# Altium PCB S7CAS-PLEIADES-CARTE-MERE_P02.PcbDoc (part 1 of 2)
Units mil, origin at the board's own origin, x right, y up, seen from the top; angles counter-clockwise.
Board outline 5000 x 5000 mil, 14 copper layers (Signal 1 (Top), GND 1, Signal 2, GND 2, 24V, GND 3, 3V3, GND 4, GND 5, POWER, GND 6, Signal 3, GND 7, Signal 4 (Bottom)), stack 60.6 mil thick; 20 components, 396 nets, 808 pads, 46 vias.
Unrouted connection lines stored in the file: 242.
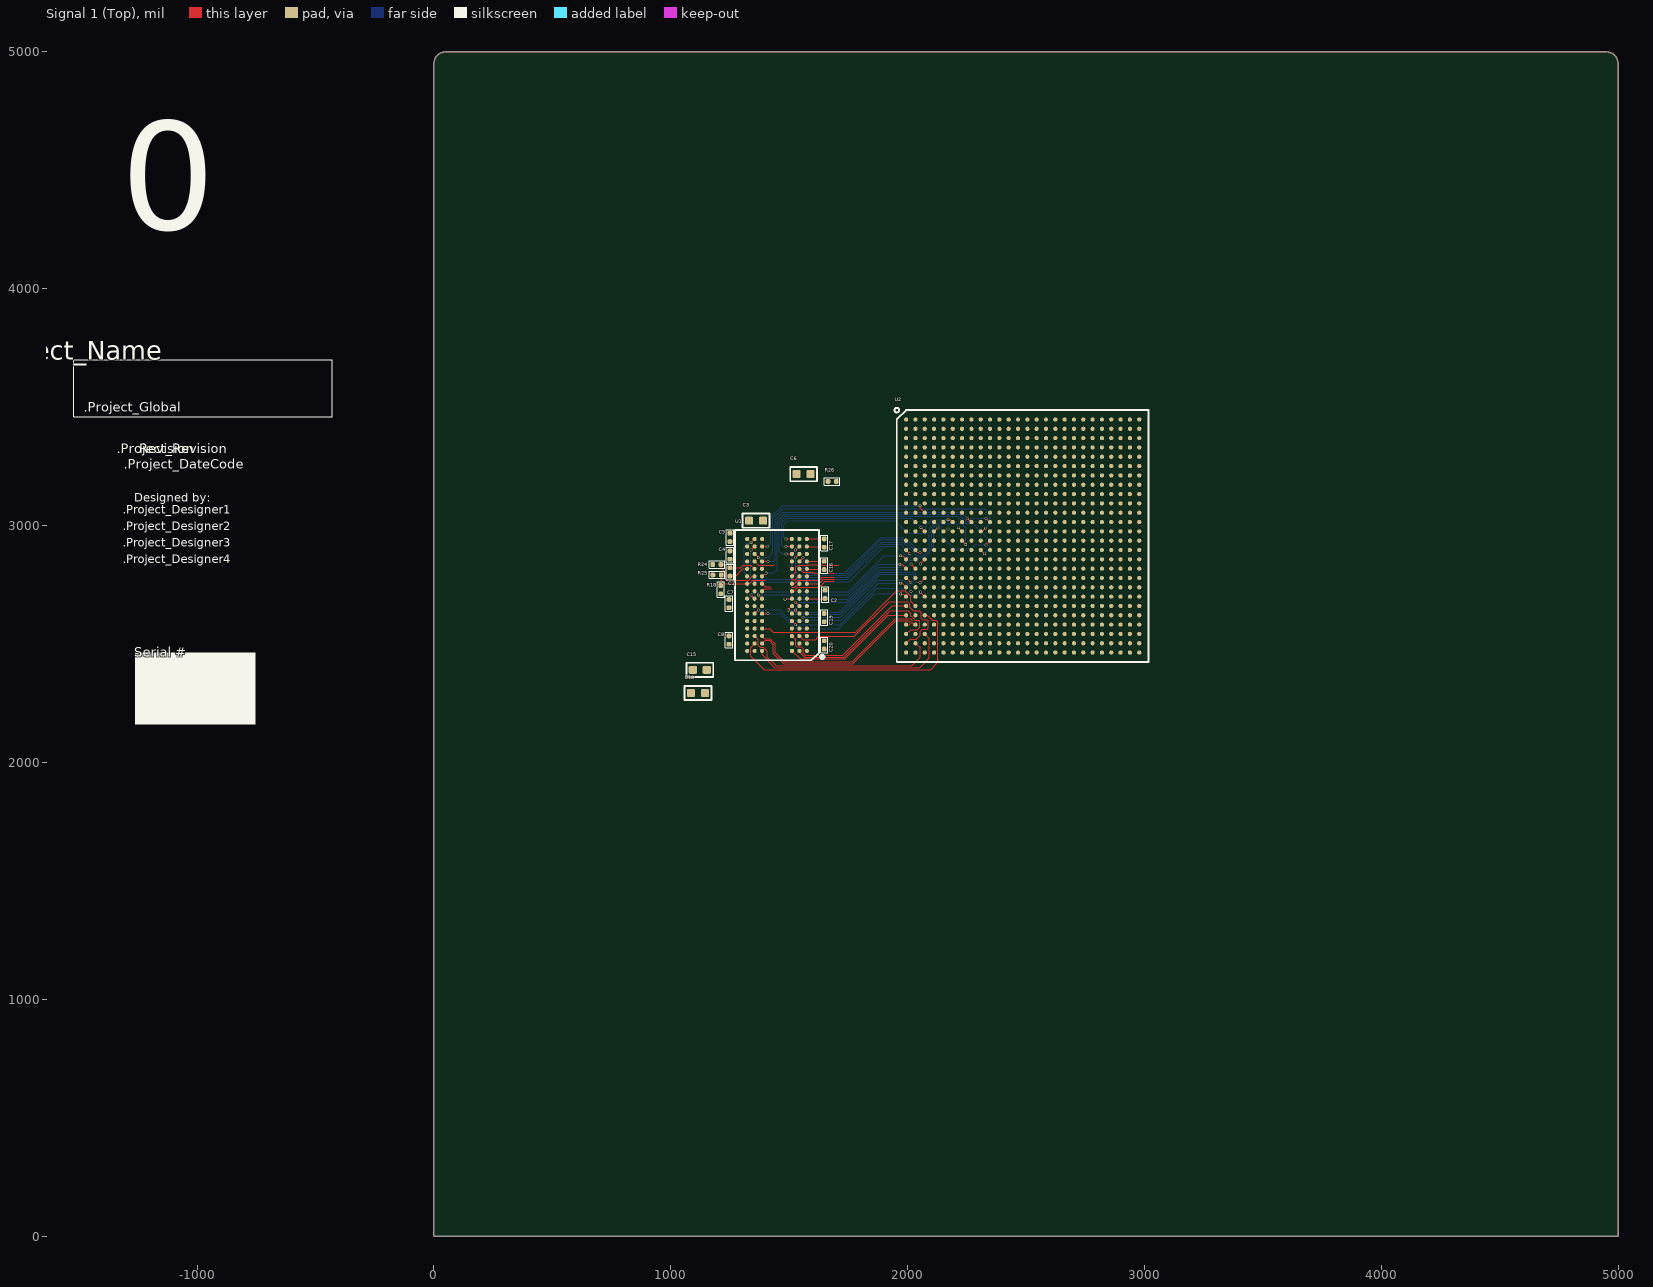
[diagram p0: Signal 1 (Top) view]
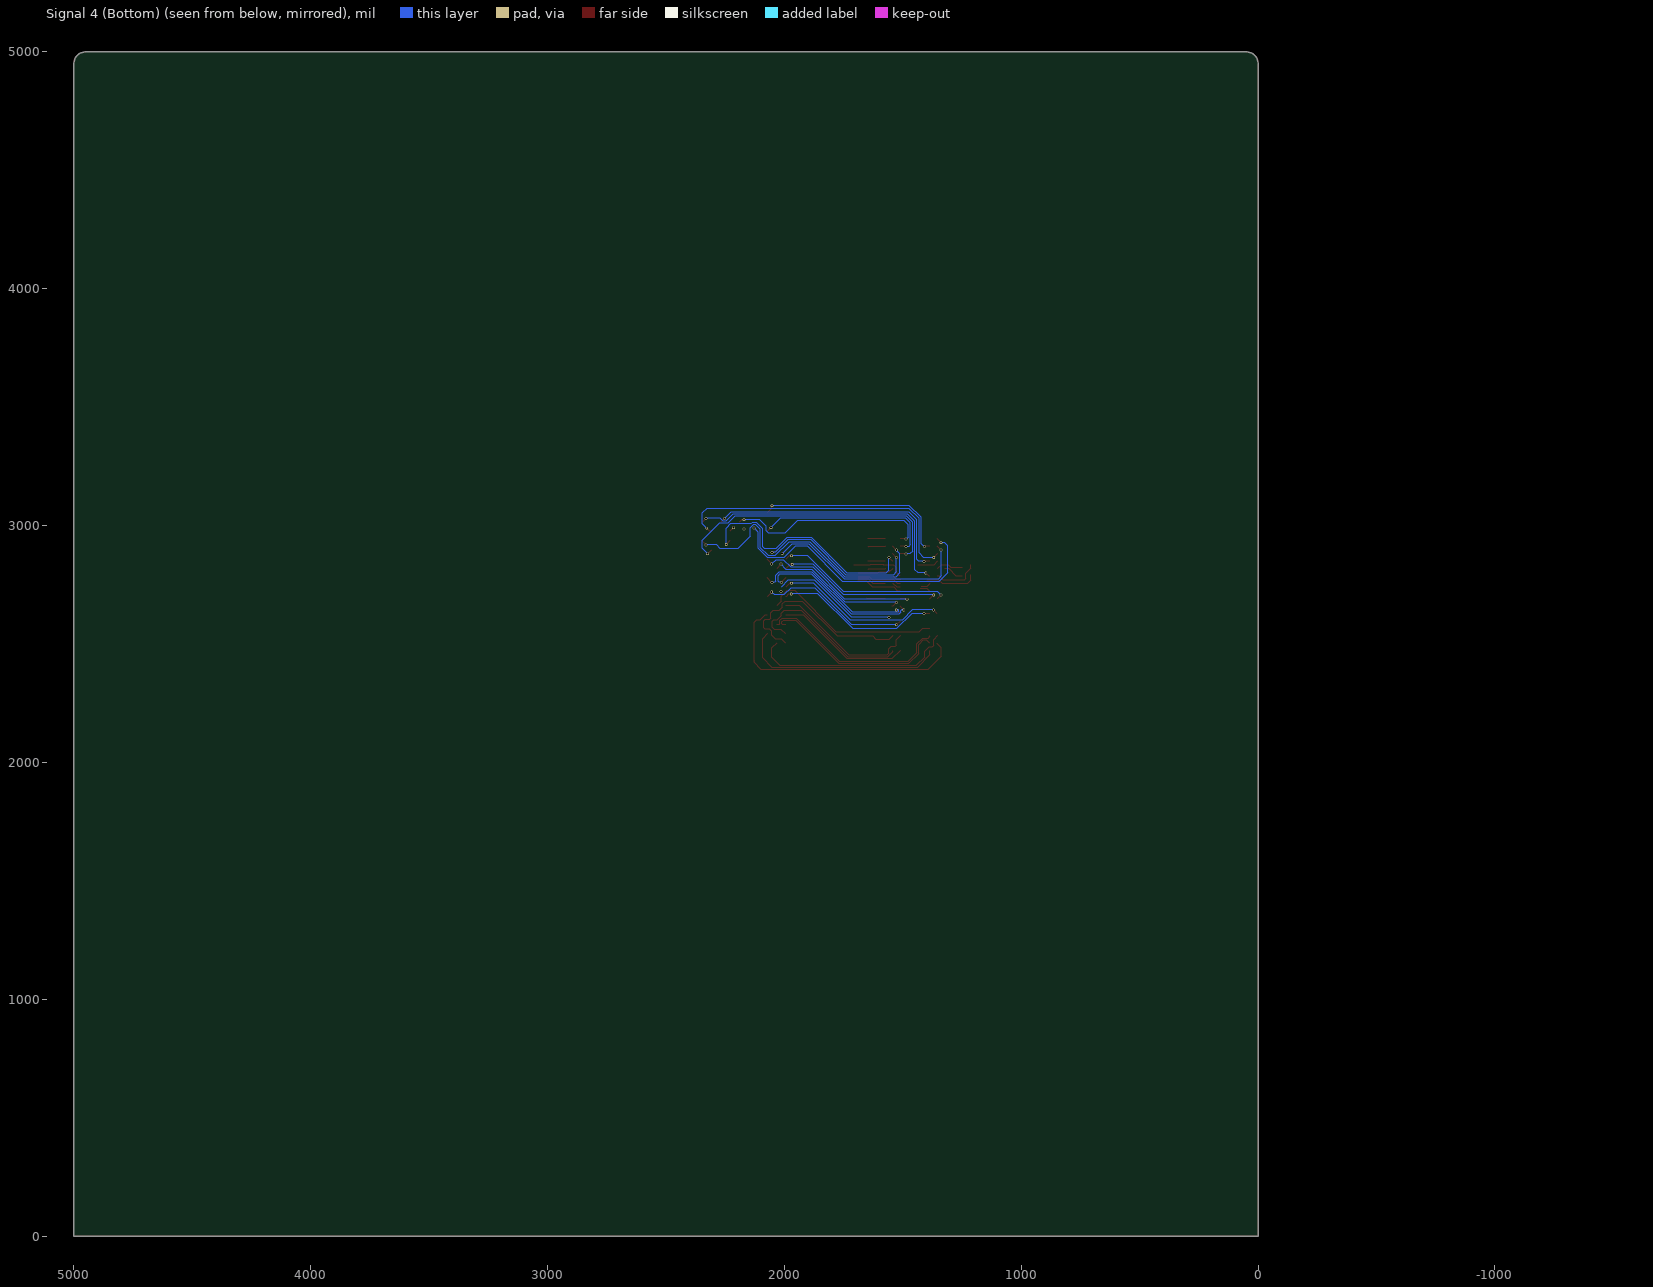
[diagram p1: Signal 4 (Bottom) view, seen from below]
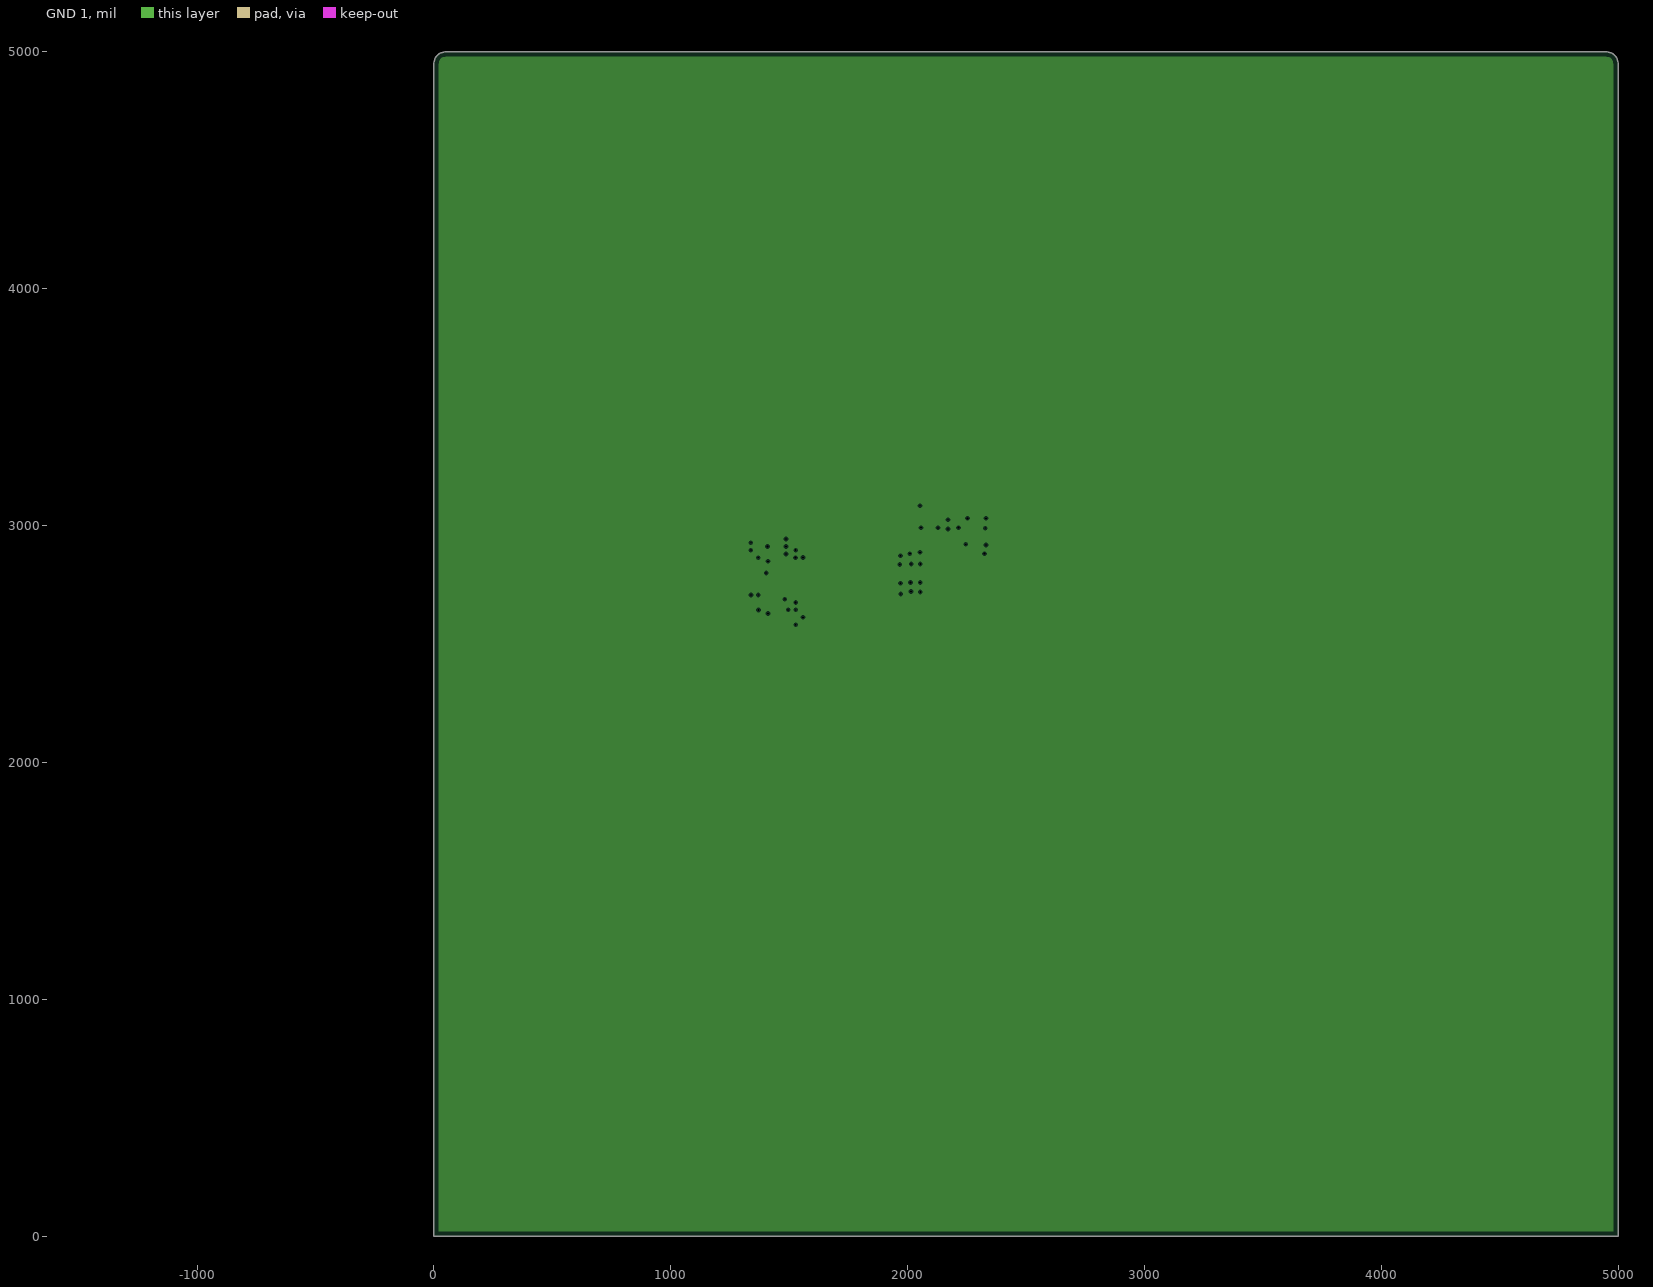
[diagram p2: GND 1, clearances drawn from the general rule]
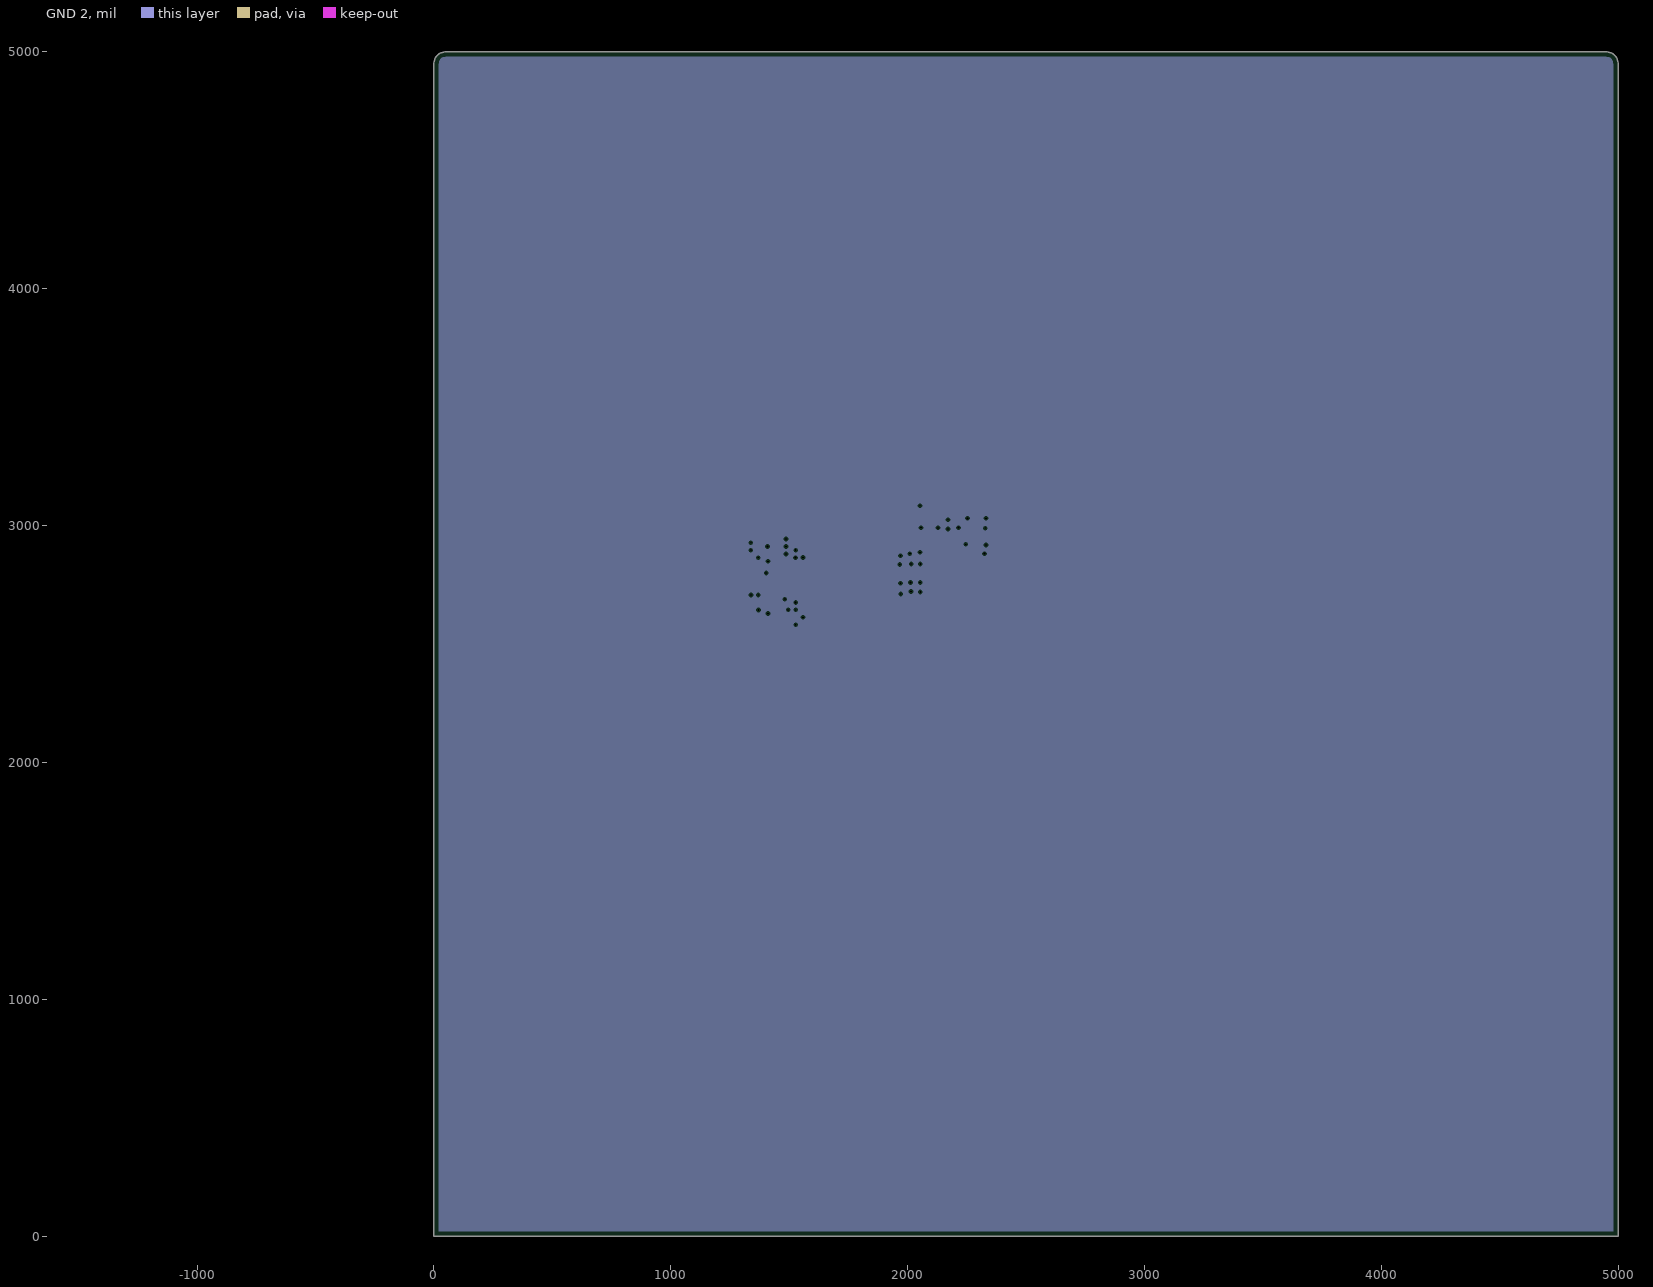
[diagram p3: GND 2, clearances drawn from the general rule]
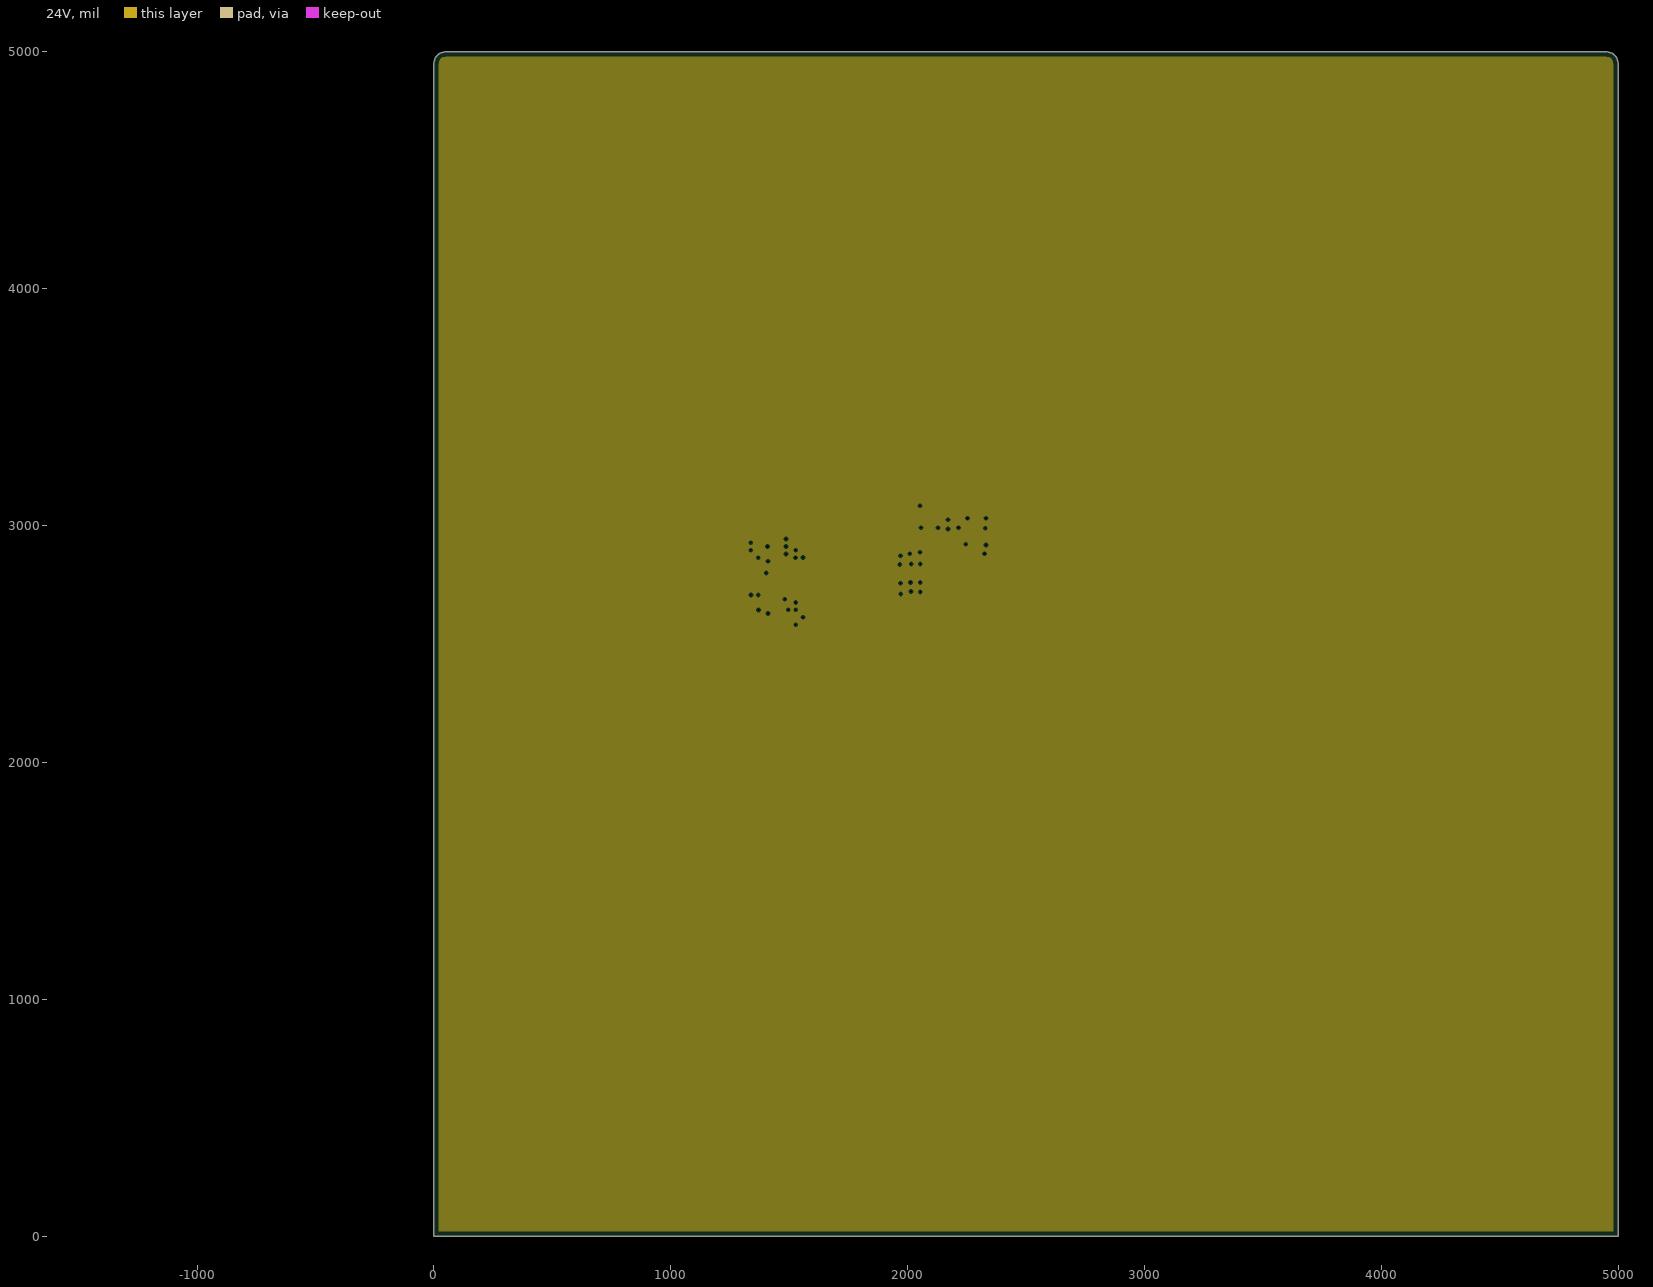
[diagram p4: 24V, clearances drawn from the general rule]
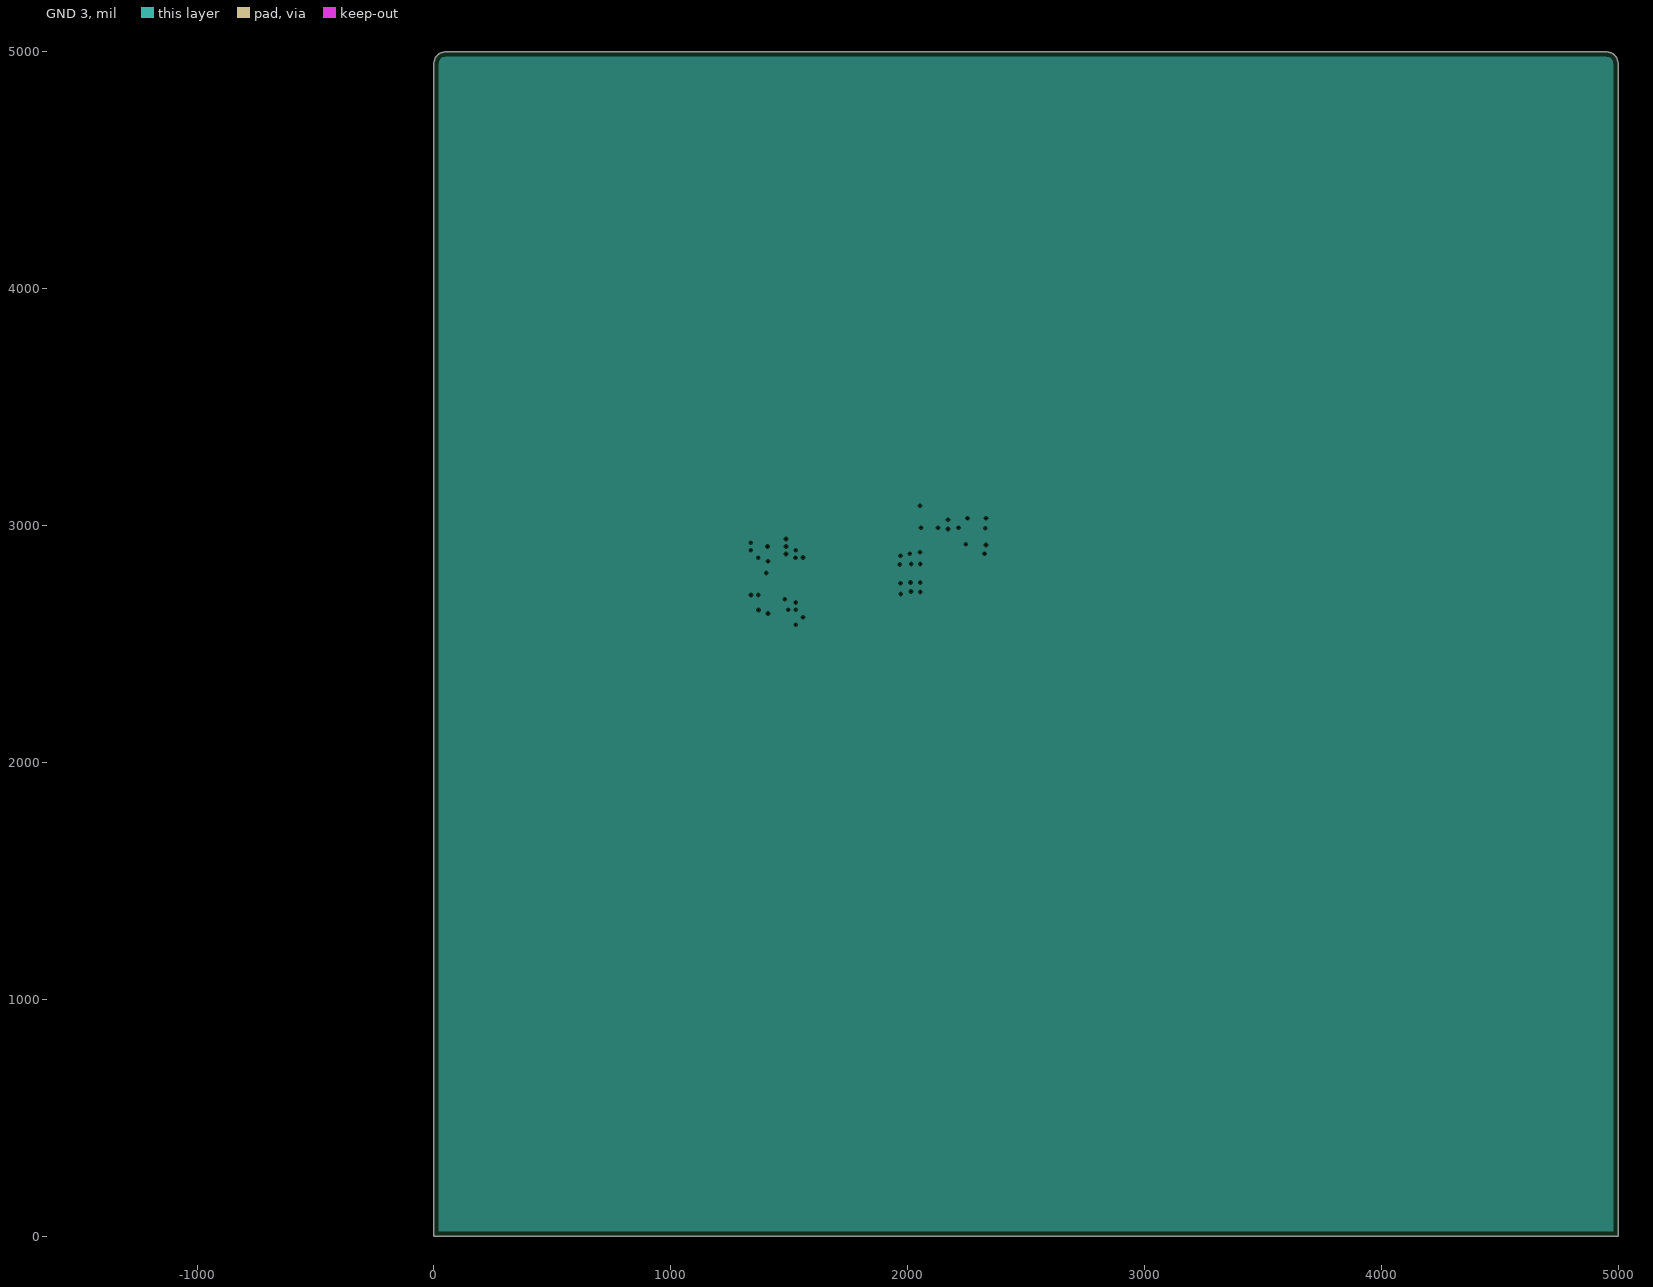
[diagram p5: GND 3, clearances drawn from the general rule]
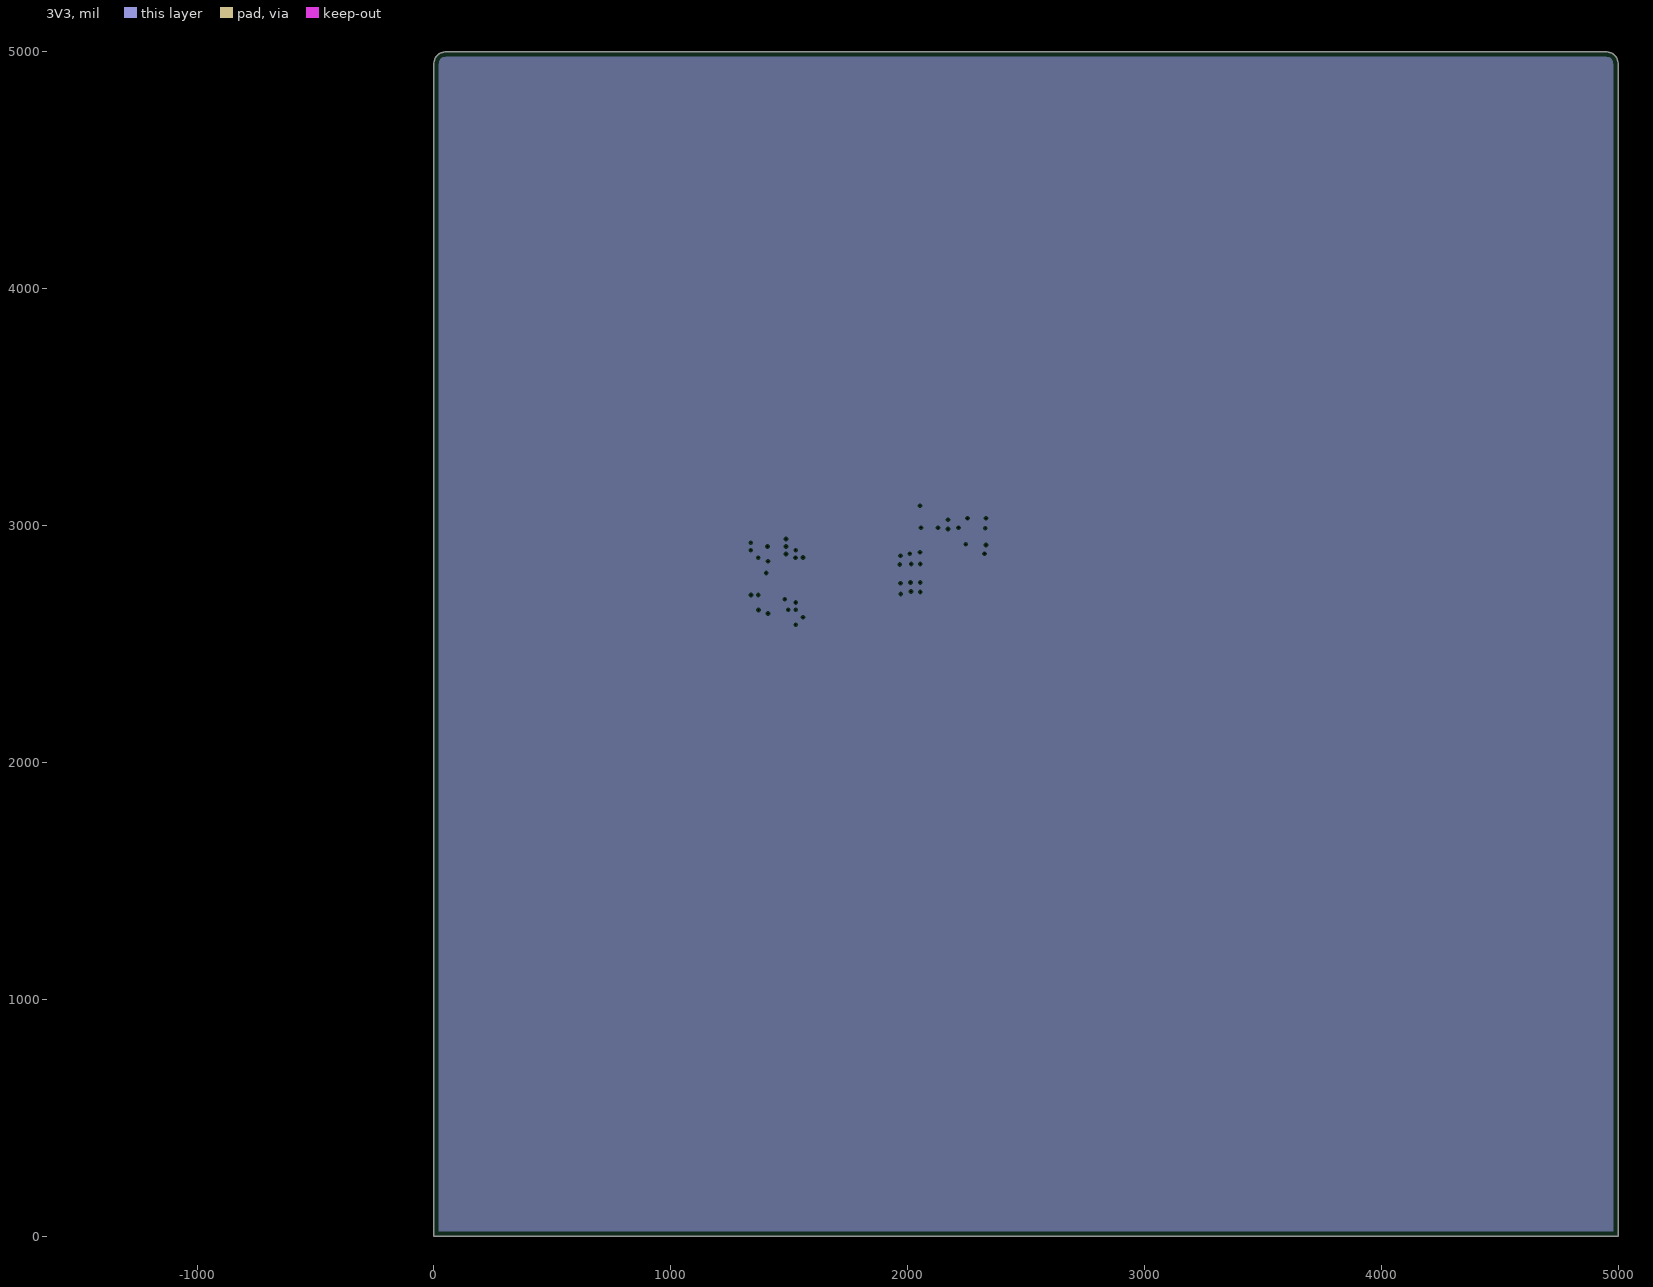
[diagram p6: 3V3, clearances drawn from the general rule]
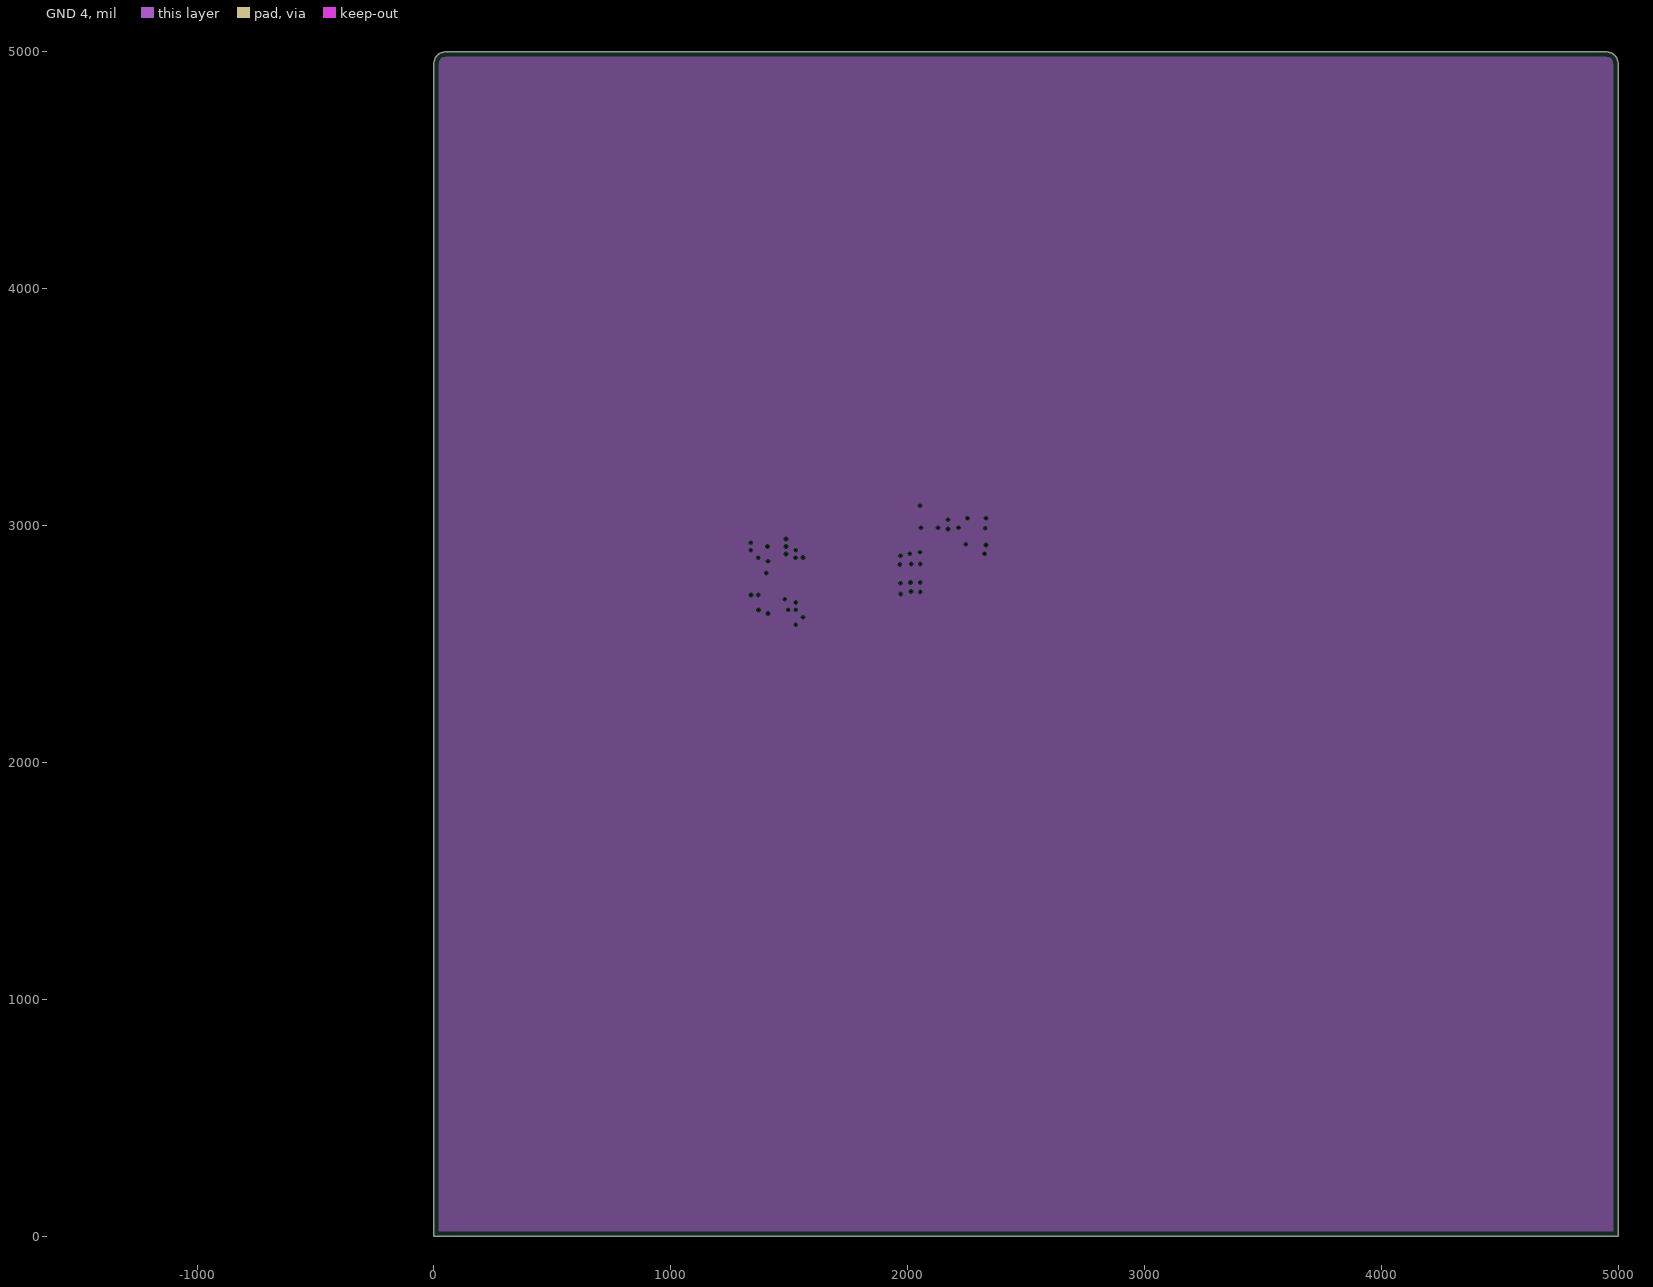
[diagram p7: GND 4, clearances drawn from the general rule]
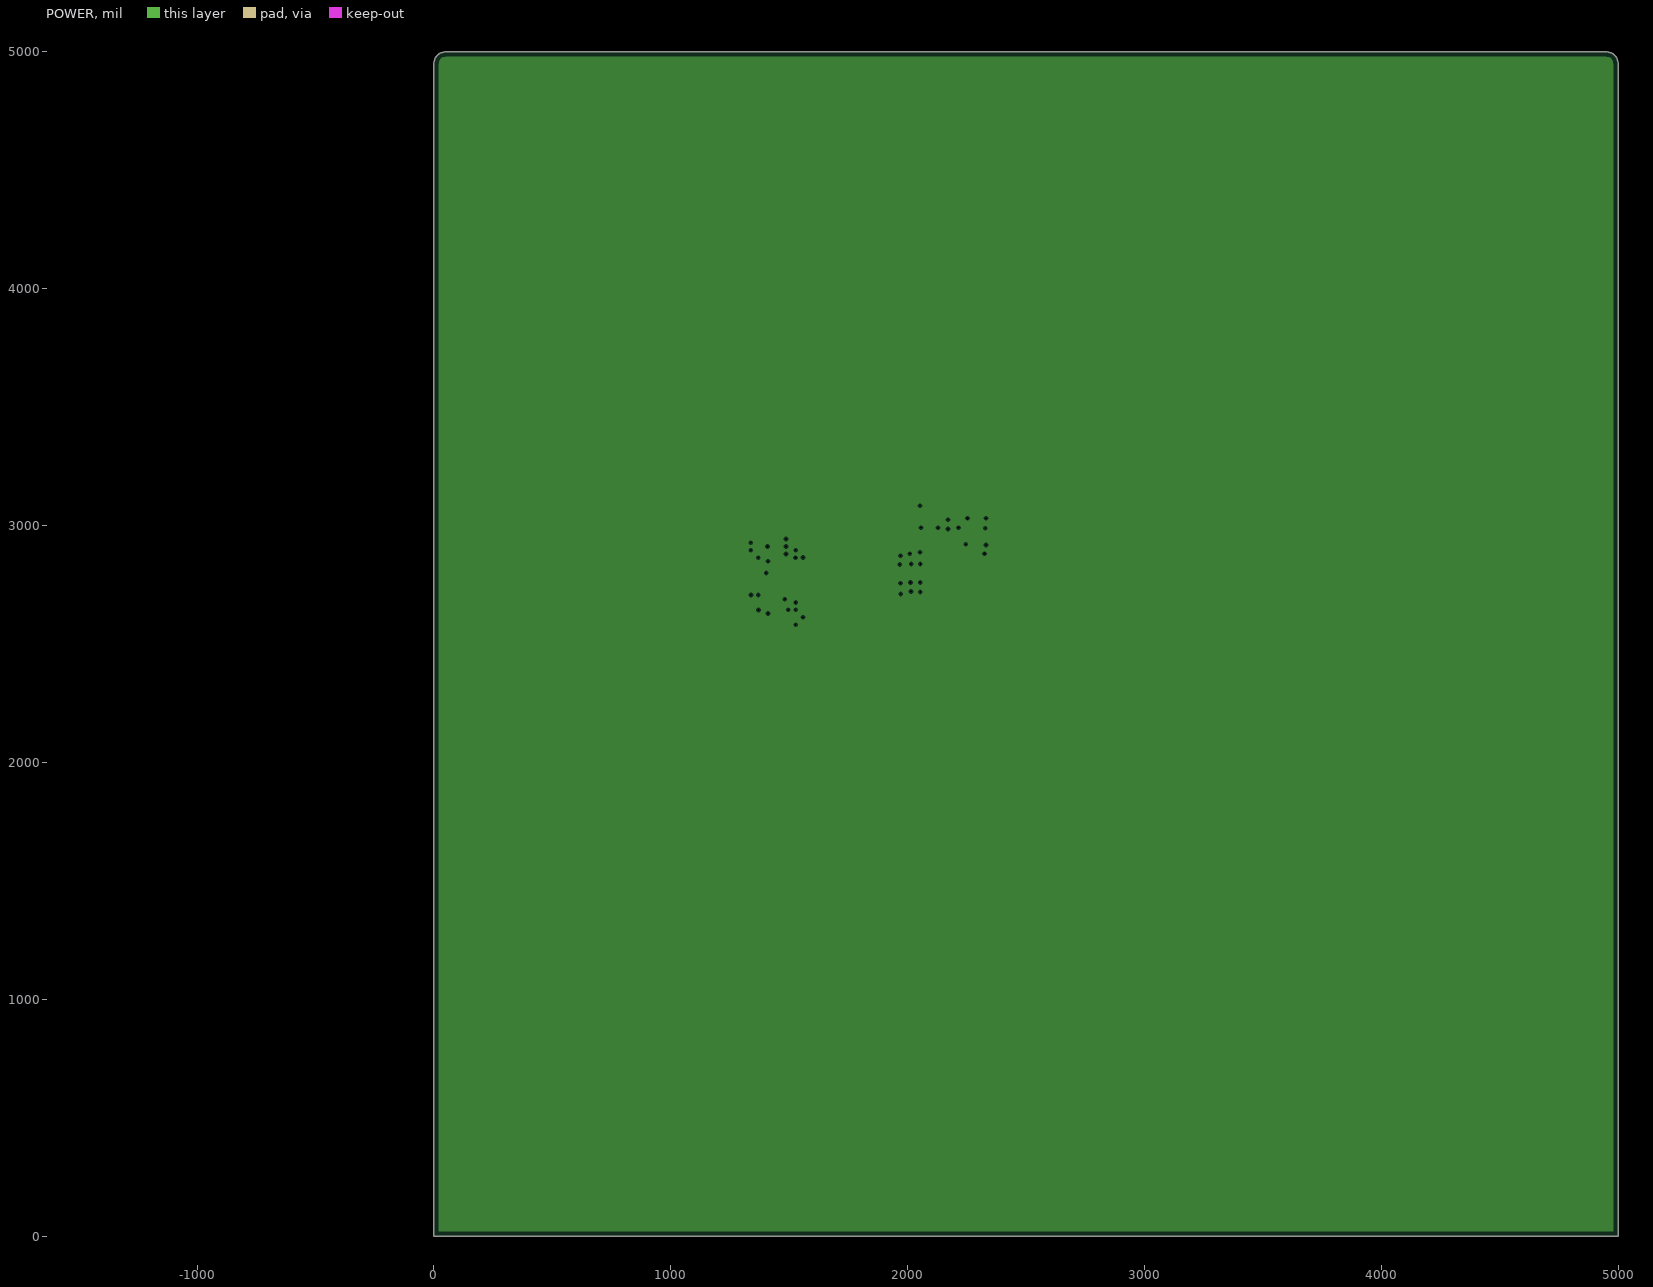
[diagram p8: POWER, clearances drawn from the general rule]
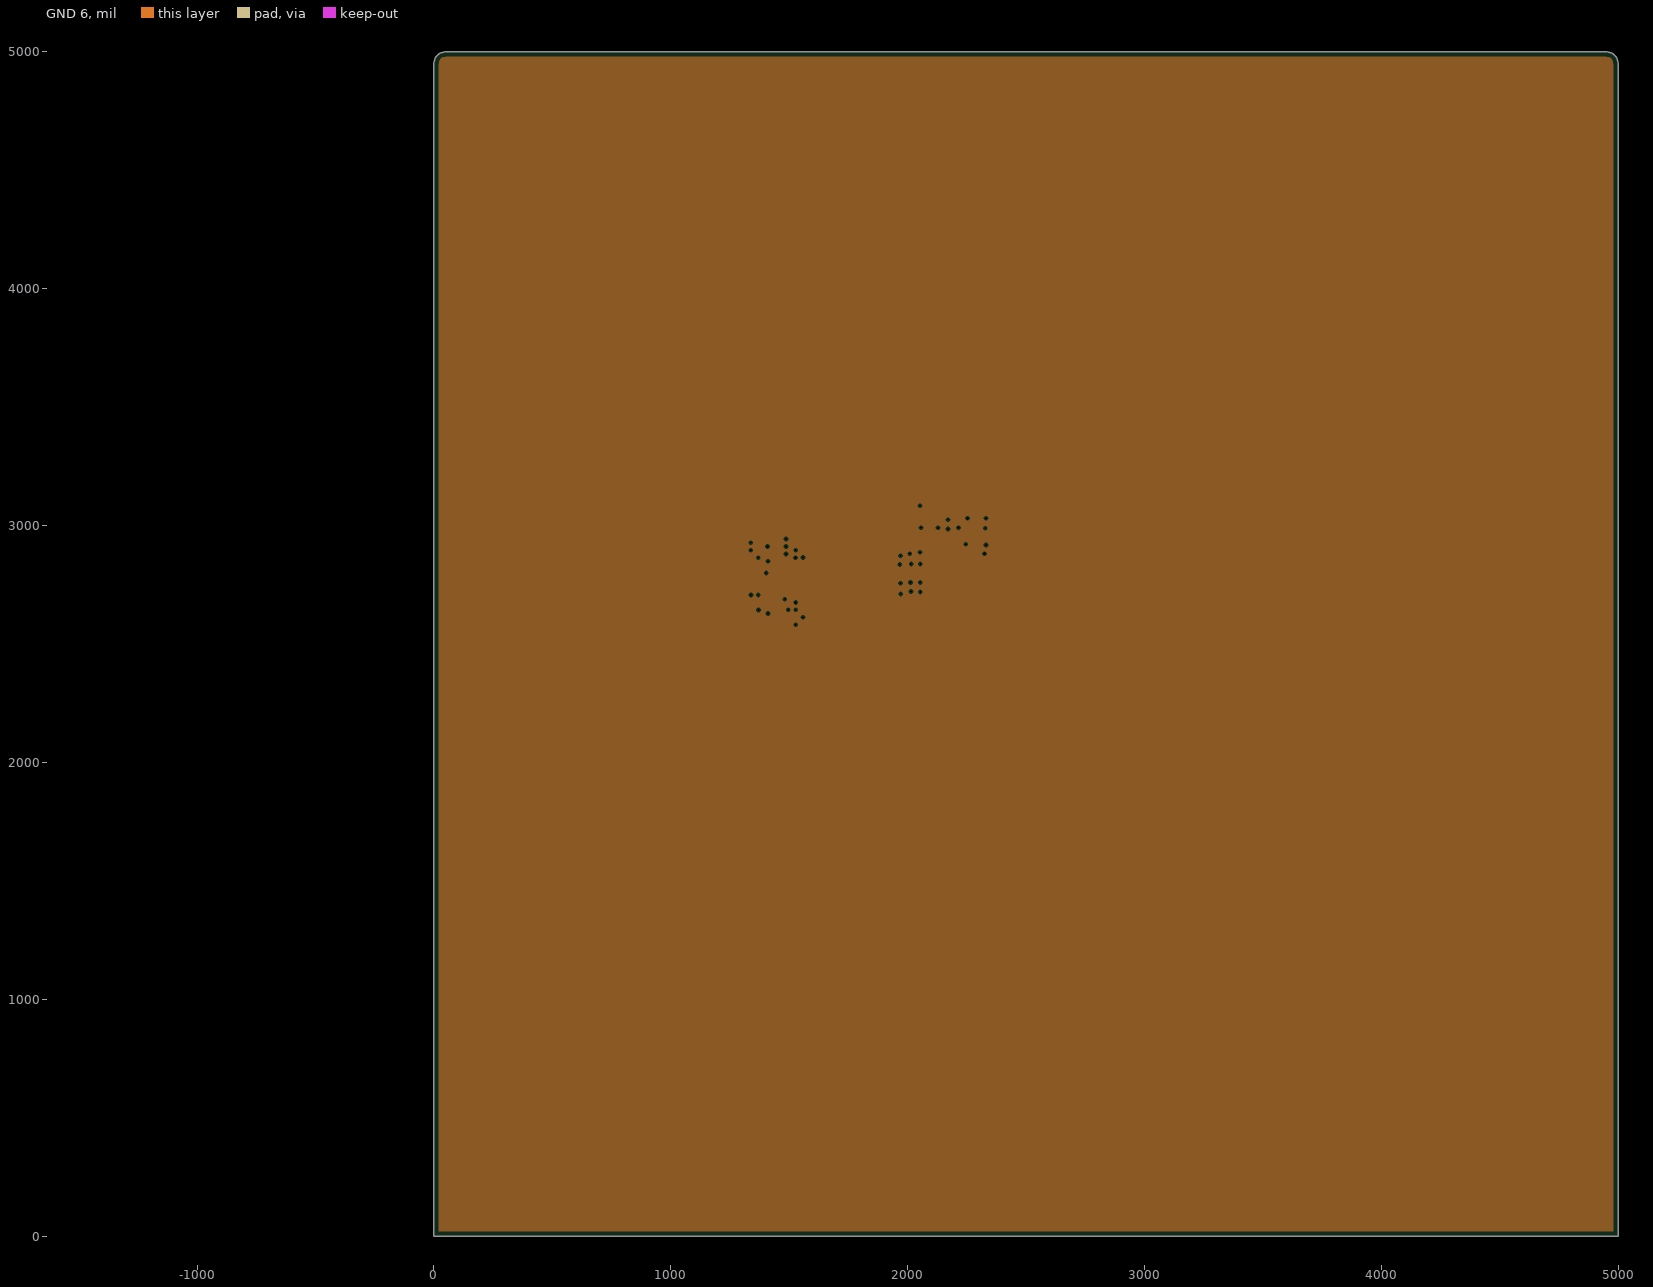
[diagram p9: GND 6, clearances drawn from the general rule]
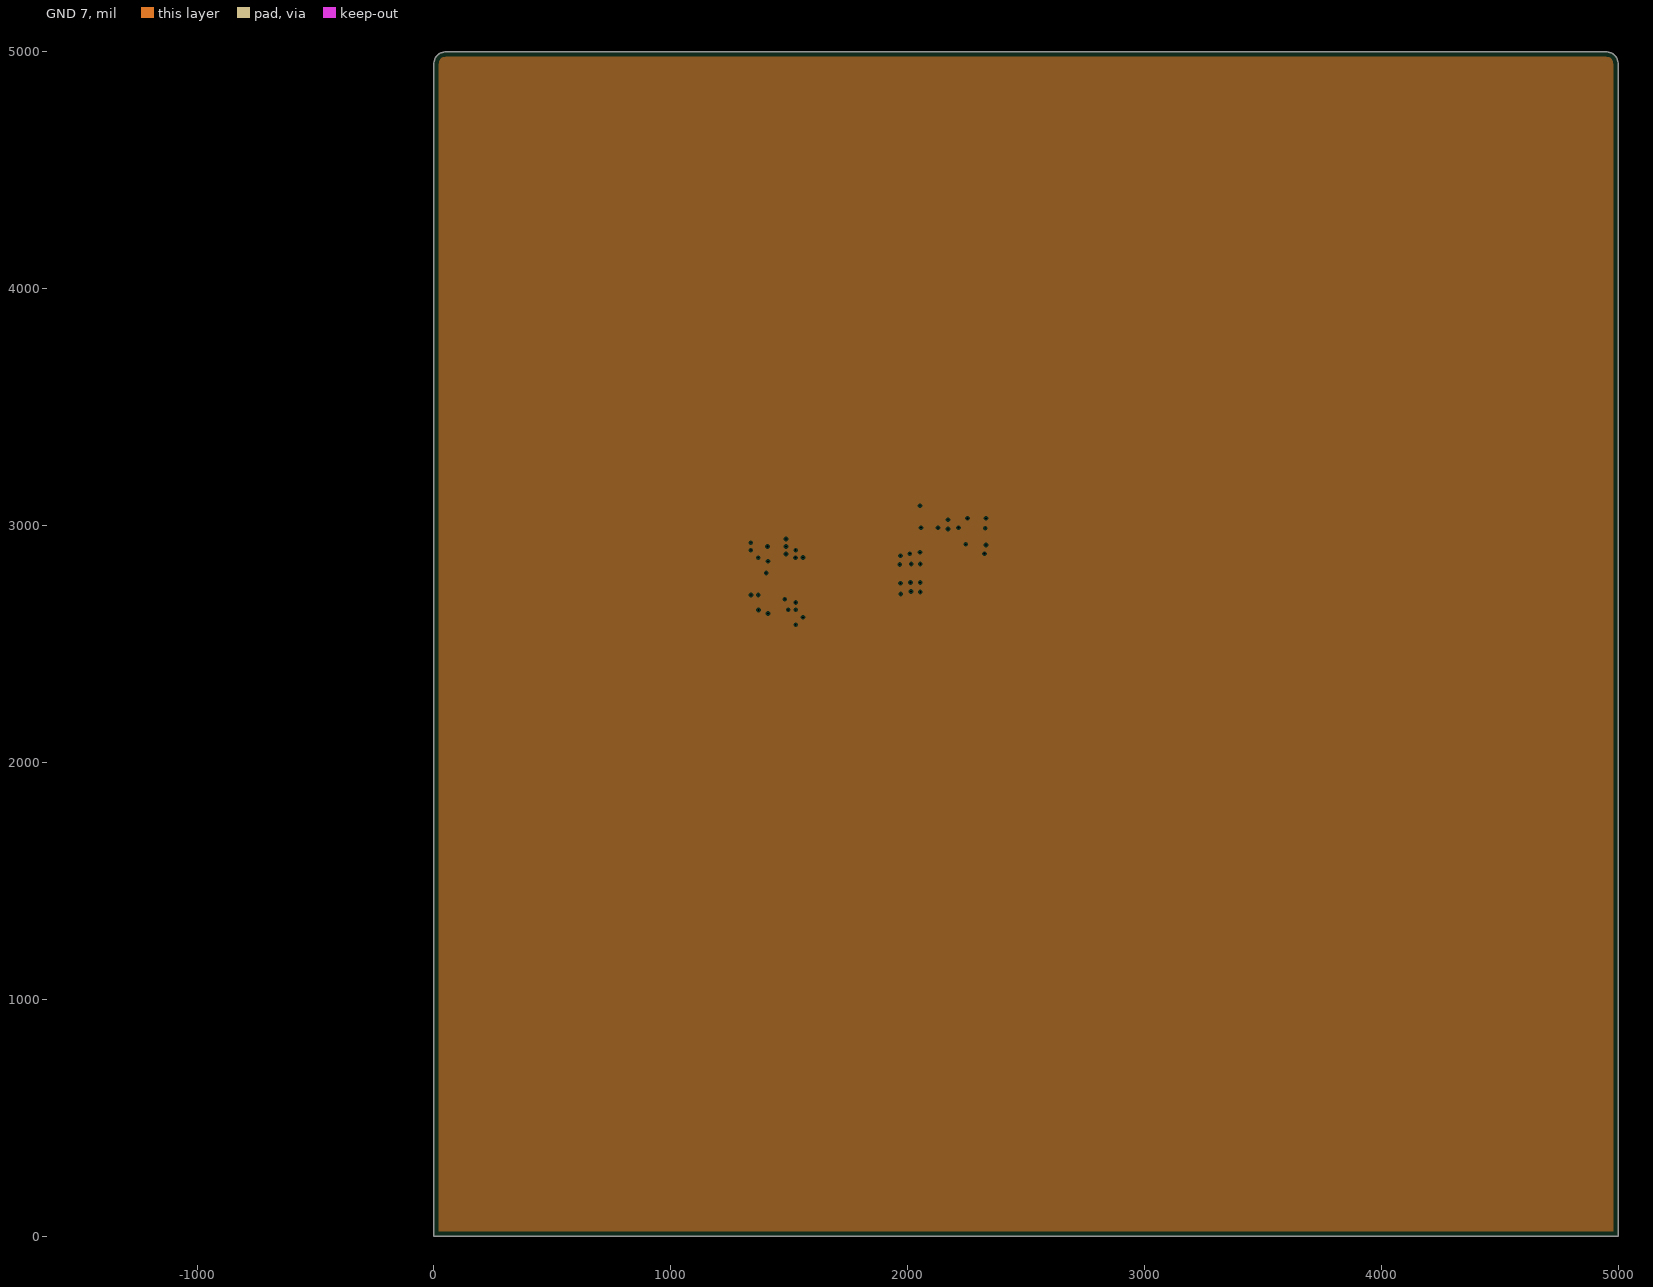
[diagram p10: GND 7, clearances drawn from the general rule]
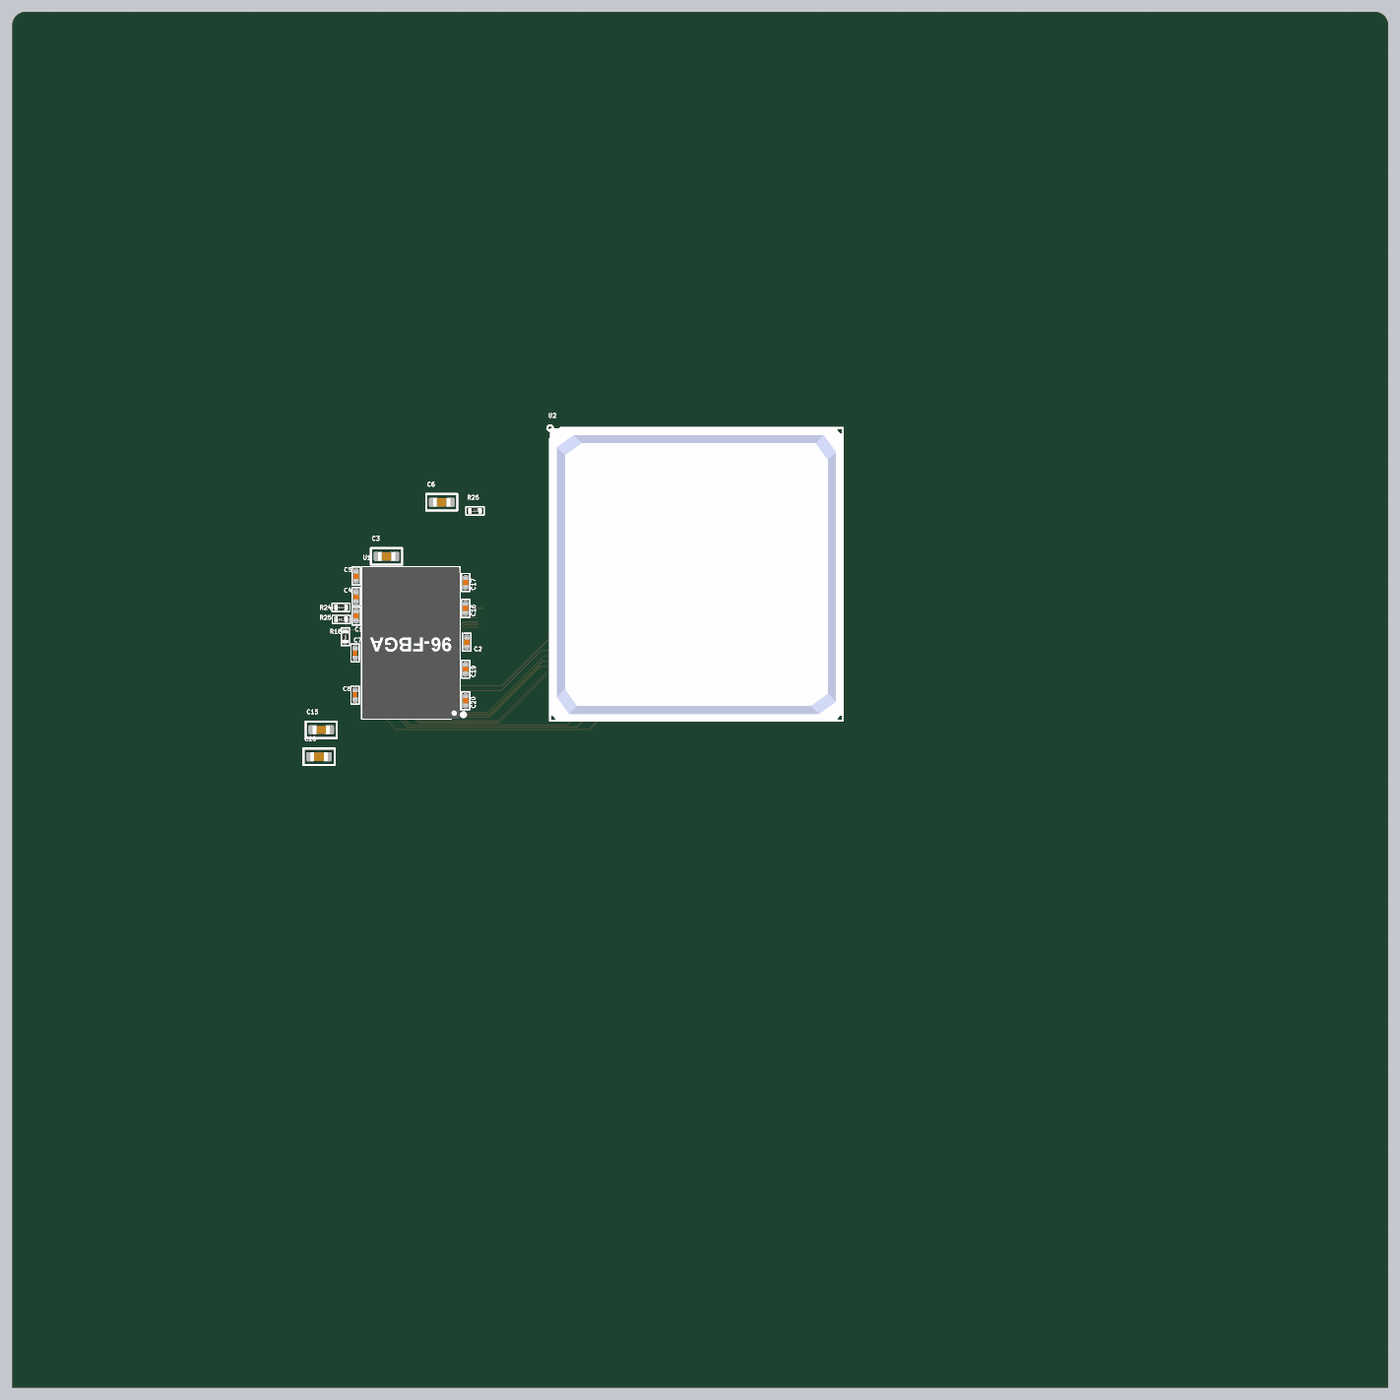
[diagram p12: 3D render of the assembled board from above, using the file's embedded part models]

## Layer stack, top to bottom
Top Solder: solder mask 0.4, Solder Resist, Dk 3.5
Signal 1 (Top): signal copper 1.4
Dielectric 1: prepreg 2.2, FR-4, Dk 4.2
GND 1: plane copper 0.7
Dielectric 2: prepreg 5, FR-4, Dk 4.1
Signal 2: signal copper 0.7
Dielectric 5: prepreg 3, PP-006, Dk 4.1
GND 2: plane copper 0.7
Dielectric 8: prepreg 5, PP-006, Dk 4.1
24V: plane copper 0.7
Dielectric 9: prepreg 3, PP-006, Dk 4.1
GND 3: plane copper 0.7
Dielectric 13: prepreg 5, PP-006, Dk 4.1
3V3: plane copper 0.7
Dielectric 3: core 3, Dk 4.2
GND 4: plane copper 0.7
Dielectric 11: prepreg 5, PP-006, Dk 4.1
GND 5: signal copper 0.7
Dielectric 12: prepreg 3, PP-006, Dk 4.1
POWER: plane copper 0.7
Dielectric 10: prepreg 5, PP-006, Dk 4.1
GND 6: plane copper 0.7
Dielectric 7: prepreg 3, PP-006, Dk 4.1
Signal 3: signal copper 0.7
Dielectric 6: prepreg 5, PP-006, Dk 4.1
GND 7: plane copper 0.7
Dielectric 4: prepreg 2.2, Dk 4.2
Signal 4 (Bottom): signal copper 1.4
Bottom Solder: solder mask 0.4, Solder Resist, Dk 3.5

## Board outline
0,0 5000,0 5000,4950 ccw(c4950,4950) 4950,5000 50,5000 ccw(c50,4950) 0,4950

## Design rules (kind name [scope] priority, off if disabled: settings)
BoardOutlineClearance [All] p1: gap=10 ignorepadtopadclearanceinfootprint=FALSE except(0: Arc-SplitContinuation Track-SplitContinuation SMDPad-SplitContinuation THPad-SplitContinuation Via-SplitContinuation Fill-SplitContinuation Poly-SplitContinuation Region-SplitContinuation Text-SplitContinuation)
Clearance [All] p1: gap=4 ignorepadtopadclearanceinfootprint=FALSE
ComponentClearance [All] p1: gap=4 collisioncheckmode=3 verticalgap=4 showdistances=FALSE
DiffPairsRouting DDR3_80ohms [All] p1: maxlimit=10 minlimit=4 mostfreqgap=10 toplayer_maxgap=4 toplayer_prefgap=4 toplayer_minwidth=4 toplayer_maxwidth=4 toplayer_prefwidth=4 midlayer1_mingap=10 midlayer1_minwidth=15 midlayer1_maxwidth=15 midlayer1_prefwidth=15 midlayer2_mingap=10 midlayer2_minwidth=15 midlayer2_maxwidth=15 midlayer2_prefwidth=15 midlayer3_mingap=10 midlayer3_minwidth=15 midlayer3_maxwidth=15 midlayer3_prefwidth=15 bottomlayer_maxgap=4 bottomlayer_prefgap=4 bottomlayer_minwidth=4 bottomlayer_maxwidth=4 bottomlayer_prefwidth=4 maxuncoupledlength=500
DiffPairsRouting [All] p2: maxlimit=10 minlimit=10 mostfreqgap=10 toplayer_minwidth=15 toplayer_maxwidth=15 toplayer_prefwidth=15 midlayer1_minwidth=15 midlayer1_maxwidth=15 midlayer1_prefwidth=15 midlayer2_minwidth=15 midlayer2_maxwidth=15 midlayer2_prefwidth=15 midlayer3_minwidth=15 midlayer3_maxwidth=15 midlayer3_prefwidth=15 bottomlayer_minwidth=15 bottomlayer_maxwidth=15 bottomlayer_prefwidth=15 maxuncoupledlength=500
HoleSize [All] p1: absolutevalues=TRUE maxlimit=1000 minlimit=8 maxpercent=80.000 minpercent=20.000
HoleToHoleClearance [All] p1: gap=10 allowstackedmicrovias=FALSE
Length [All] p1: maxlimit=100000 minlimit=0
MatchedLengths [All] p1: tolerance=150 checknetsindiffpair=FALSE checkdiffpairvsdiffpair=TRUE checkxsignals=TRUE checkothers=TRUE
MinimumSolderMaskSliver [All] p1: minsoldermaskwidth=3
ParallelSegment [All] p1: limit=1000 gap=12
PlaneClearance [All] p1: clearance=6
PlaneConnect [All] p1: pad.planeconnectstyle=Relief pad.reliefexpansion=20 pad.reliefentries=4 pad.reliefconductorwidth=10 pad.reliefairgap=10 via.planeconnectstyle=Direct via.reliefexpansion=20 via.reliefentries=4 via.reliefconductorwidth=10 via.reliefairgap=10
PolygonConnect [All] p1: thpad.connectstyle=Relief thpad.reliefconductorwidth=10 thpad.reliefentries=4 thpad.polygonreliefangle="90 Angle" thpad.airgapwidth=10 smdpad.connectstyle=Direct smdpad.reliefconductorwidth=10 smdpad.reliefentries=4 smdpad.polygonreliefangle="90 Angle" smdpad.airgapwidth=10 via.connectstyle=Direct via.reliefconductorwidth=10 via.reliefentries=4 via.polygonreliefangle="90 Angle" via.airgapwidth=10
RoomDefinition S7CAS-PLEIADES-CARTE-MERE_P02_DDR3 [InComponentClass('S7CAS-PLEIADES-CARTE-MERE_P02_DDR3')] p1: confinementstyle=ConfineIn formatcopy=TRUE lockcomponents=FALSE outline 5050,3110 17740,3110 17740,3790 5050,3790
RoutingVias [All] p1: holewidth=8 width=12 viastyle="Through Hole" minholewidth=8 minwidth=12 maxholewidth=15 maxwidth=20
SilkToSilkClearance [All] p1: silktosilkclearance=4
SilkToSolderMaskClearance [IsPad] p1: minsilkscreentomaskgap=2 clearancetoexposedcopper=FALSE
SolderMaskExpansion [All] p1: expansion=2
StubLength [All] p1: limit=10
UnConnectedPin [All] p1:
UnRoutedNet [All] p1: checkbadconnections=TRUE
ViasUnderSMD [All] p1: allowed=FALSE
Width [All] p1: maxlimit=1000 minlimit=3 preferedwidth=6 toplayer_prefwidth=5 midlayer1_minwidth=4 midlayer2_minwidth=4 midlayer3_minwidth=4 bottomlayer_prefwidth=5 minimp=50.000000 maximp=50.000000 favimp=50.000000
20 further rules are at their usual default settings.

## Classes and differential pairs
differential pair class DIFF_PAIR: CLK0_M2C CLK1_M2C HA00_CC HA01_CC HA02 HA03 HA04 HA05 HA06 HA07 HA08 HA09 HA10 HA11 HA12 HA13 HA14 HA15 HA16 HA17_CC HA18 HA19 HA20 HA21 HA22 HA23 HB00_CC HB01 HB02 HB03 HB04 HB05 HB06_CC HB07 HB08 HB09 HB10 HB11 HB12 HB13 HB14 HB15 HB16 HB17_CC HB18 HB19 HB20 HB21 LA00_CC LA01_CC LA02 LA03 LA04 LA05 LA06 LA07 LA08 LA09 LA10 LA11 LA12 LA13 LA14 LA15 LA16 LA17_CC LA18_CC LA19 LA20 LA21 LA22 LA23 LA24 LA25 LA26 LA27 LA28 LA29 LA30 LA31 LA32 LA33
net class USB_ISO: ISO_JTAG_TCK ISO_JTAG_TDI ISO_JTAG_TDO ISO_JTAG_TMS ISO_UART_CTS# ISO_UART_RTS# ISO_UART_RXD ISO_UART_TXD NetU19_CN2-8 NetU19_CN2-13 NetU19_CN2-14 NetU19_CN2-15 NetU19_CN2-16 NetU19_CN2-17 NetU19_CN2-18 NetU19_CN2-19 NetU19_CN2-20 NetU19_CN2-22 NetU19_CN2-23 NetU19_CN2-24 NetU19_CN2-25 NetU19_CN2-26 NetU19_CN3-5 NetU19_CN3-6 NetU19_CN3-7 NetU19_CN3-8 NetU19_CN3-9 NetU19_CN3-10 NetU19_CN3-11 NetU19_CN3-13 NetU19_CN3-14 NetU19_CN3-15 NetU19_CN3-16 NetU19_CN3-17 NetU19_CN3-18 NetU19_CN3-19 NetU19_CN3-20 NetU19_CN3-21 USB_3V3 USB_5V USB_GND
net class PHY_TXD[0..3]: PHY_TXD0 PHY_TXD1 PHY_TXD2 PHY_TXD3
net class PHY_RXD[0..3]: PHY_RXD0 PHY_RXD1 PHY_RXD2 PHY_RXD3
net class DDR3_DQ[0..15]: DDR3_DQ0 DDR3_DQ1 DDR3_DQ2 DDR3_DQ3 DDR3_DQ4 DDR3_DQ5 DDR3_DQ6 DDR3_DQ7 DDR3_DQ8 DDR3_DQ9 DDR3_DQ10 DDR3_DQ11 DDR3_DQ12 DDR3_DQ13 DDR3_DQ14 DDR3_DQ15
net class DDR3_BA[0..2]: DDR3_BA0 DDR3_BA1 DDR3_BA2
net class DDR3_A[13..0]: DDR3_A0 DDR3_A1 DDR3_A2 DDR3_A3 DDR3_A4 DDR3_A5 DDR3_A6 DDR3_A7 DDR3_A8 DDR3_A9 DDR3_A10 DDR3_A11 DDR3_A12 DDR3_A13
net class 80ohms: LDQS_N LDQS_P UDQS_N UDQS_P
net class 50ohms: NetR47_1 NetR49_1 NetR51_1 NetR52_1 NetR53_1 NetR54_1 NetR55_1 PHY_RXC PHY_RXD0 PHY_RXD1 PHY_RXD2 PHY_RXD3 PHY_RXDV PHY_RXER RD_n RD_p RX_n RX_p TD_n TD_p TX_n TX_p
net class 40ohms: CK_P DDR3.CKE DDR3.LDM DDR3.UDM DDR3_A0 DDR3_A1 DDR3_A2 DDR3_A3 DDR3_A4 DDR3_A5 DDR3_A6 DDR3_A7 DDR3_A8 DDR3_A9 DDR3_A10 DDR3_A11 DDR3_A12 DDR3_A13 DDR3_BA0 DDR3_BA1 DDR3_BA2 DDR3_DQ0 DDR3_DQ1 DDR3_DQ2 DDR3_DQ3 DDR3_DQ4 DDR3_DQ5 DDR3_DQ6 DDR3_DQ7 DDR3_DQ8 DDR3_DQ9 DDR3_DQ10 DDR3_DQ11 DDR3_DQ12 DDR3_DQ13 DDR3_DQ14 DDR3_DQ15
component class S7CAS-PLEIADES-CARTE-MERE_P02_POWER: *1 D3 F1 U8 U9 U10 U11
component class S7CAS-PLEIADES-CARTE-MERE_P02_POWER_CARRIER: U12 U13 U14 U15 U16
component class S7CAS-PLEIADES-CARTE-MERE_P02_FPGA_B0B1: U2
component class S7CAS-PLEIADES-CARTE-MERE_P02_FLASH: U6
component class S7CAS-PLEIADES-CARTE-MERE_P02_DDR3: C3 C4 C5 C6 C7 C8 C15 C16 C17 C18 C19 C20 R24 R25 R26
component class S7CAS-PLEIADES-CARTE-MERE_P02_CLOCKS: U4
differential pair UDQS: +UDQS_P -UDQS_N
differential pair LDQS: +LDQS_P -LDQS_N
differential pair LA33: +LA33_p -LA33_n
differential pair LA32: +LA32_p -LA32_n
differential pair LA31: +LA31_p -LA31_n
differential pair LA30: +LA30_p -LA30_n
differential pair LA29: +LA29_p -LA29_n
differential pair LA28: +LA28_p -LA28_n
differential pair LA27: +LA27_p -LA27_n
differential pair LA26: +LA26_p -LA26_n
differential pair LA25: +LA25_p -LA25_n
differential pair LA24: +LA24_p -LA24_n
differential pair LA23: +LA23_p -LA23_n
differential pair LA22: +LA22_p -LA22_n
differential pair LA21: +LA21_p -LA21_n
differential pair LA20: +LA20_p -LA20_n
differential pair LA19: +LA19_p -LA19_n
differential pair LA18_CC: +LA18_CC_p -LA18_CC_n
differential pair LA17_CC: +LA17_CC_p -LA17_CC_n
differential pair LA16: +LA16_p -LA16_n
differential pair LA15: +LA15_p -LA15_n
differential pair LA14: +LA14_p -LA14_n
differential pair LA13: +LA13_p -LA13_n
differential pair LA12: +LA12_p -LA12_n
differential pair LA11: +LA11_p -LA11_n
differential pair LA10: +LA10_p -LA10_n
differential pair LA09: +LA09_p -LA09_n
differential pair LA08: +LA08_p -LA08_n
differential pair LA07: +LA07_p -LA07_n
differential pair LA06: +LA06_p -LA06_n
differential pair LA05: +LA05_p -LA05_n
differential pair LA04: +LA04_p -LA04_n
differential pair LA03: +LA03_p -LA03_n
differential pair LA02: +LA02_p -LA02_n
differential pair LA01_CC: +LA01_CC_p -LA01_CC_n
differential pair LA00_CC: +LA00_CC_p -LA00_CC_n
differential pair HB21: +HB21_p -HB21_n
differential pair HB20: +HB20_p -HB20_n
differential pair HB19: +HB19_p -HB19_n
differential pair HB18: +HB18_p -HB18_n
differential pair HB17_CC: +HB17_CC_p -HB17_CC_n
differential pair HB16: +HB16_p -HB16_n
differential pair HB15: +HB15_p -HB15_n
differential pair HB14: +HB14_p -HB14_n
differential pair HB13: +HB13_p -HB13_n
differential pair HB12: +HB12_p -HB12_n
differential pair HB11: +HB11_p -HB11_n
differential pair HB10: +HB10_p -HB10_n
differential pair HB09: +HB09_p -HB09_n
differential pair HB08: +HB08_p -HB08_n
differential pair HB07: +HB07_p -HB07_n
differential pair HB06_CC: +HB06_CC_p -HB06_CC_n
differential pair HB05: +HB05_p -HB05_n
differential pair HB04: +HB04_p -HB04_n
differential pair HB03: +HB03_p -HB03_n
differential pair HB02: +HB02_p -HB02_n
differential pair HB01: +HB01_p -HB01_n
differential pair HB00_CC: +HB00_CC_p -HB00_CC_n
differential pair HA23: +HA23_p -HA23_n
differential pair HA22: +HA22_p -HA22_n
differential pair HA21: +HA21_p -HA21_n
differential pair HA20: +HA20_p -HA20_n
differential pair HA19: +HA19_p -HA19_n
differential pair HA18: +HA18_p -HA18_n
differential pair HA17_CC: +HA17_CC_p -HA17_CC_n
differential pair HA16: +HA16_p -HA16_n
differential pair HA15: +HA15_p -HA15_n
differential pair HA14: +HA14_p -HA14_n
differential pair HA13: +HA13_p -HA13_n
differential pair HA12: +HA12_p -HA12_n
differential pair HA11: +HA11_p -HA11_n
differential pair HA10: +HA10_p -HA10_n
differential pair HA09: +HA09_p -HA09_n
differential pair HA08: +HA08_p -HA08_n
differential pair HA07: +HA07_p -HA07_n
differential pair HA06: +HA06_p -HA06_n
differential pair HA05: +HA05_p -HA05_n
differential pair HA04: +HA04_p -HA04_n
differential pair HA03: +HA03_p -HA03_n
differential pair HA02: +HA02_p -HA02_n
differential pair HA01_CC: +HA01_CC_p -HA01_CC_n
differential pair HA00_CC: +HA00_CC_p -HA00_CC_n
differential pair CLK3_BIDIR: +CLK3_BIDIR_p -CLK3_BIDIR_n
differential pair CLK2_BIDIR: +CLK2_BIDIR_p -CLK2_BIDIR_n
differential pair CLK1_M2C: +CLK1_M2C_p -CLK1_M2C_n
differential pair CLK0_M2C: +CLK0_M2C_p -CLK0_M2C_n
differential pair CK: +CK_P -CK_N

## Components (designator, comment, footprint, x,y, rotation, side; value= is the part's Value field where it differs from the comment)
C1 "CAP - 0402" CAP_0402 1250,2804.13 r90 top value=100nF
C2 "CAP - 0402" CAP_0402 1651.57,2709.65 r270 top value=1nF
C3 "CAP - 0603" CAP_0603 1360.24,3020.67 r0 top value=2.2uF
C4 "CAP - 0402" CAP_0402 1250,2875 r270 top value=22nF
C5 "CAP - 0402" CAP_0402 1250,2949.8 r270 top value=220pF
C6 "CAP - 0603" CAP_0603 1560.83,3217.32 r180 top value=2.2uF
C7 "CAP - 0402" CAP_0402 1246.06,2670.28 r90 top value=22nF
C8 "CAP - 0402" CAP_0402 1246.06,2516.73 r90 top value=220pF
C15 "CAP - 0603" CAP_0603 1123.03,2390.75 r0 top value=2.2uF
C16 "CAP - 0402" CAP_0402 1647.64,2831.69 r90 top value=22nF
C17 "CAP - 0402" CAP_0402 1647.64,2926.18 r270 top value=220pF
C18 "CAP - 0603" CAP_0603 1115.16,2293.31 r0 top value=2.2uF
C19 "CAP - 0402" CAP_0402 1647.64,2611.22 r90 top value=22nF
C20 "CAP - 0402" CAP_0402 1647.64,2496.26 r270 top value=220pF
R18 "RES - 0402" RES_0402 1210.63,2729.33 r90 top value=80R0
R24 "RES - 0402" RES_0402 1194.88,2835.63 r0 top value=240R0
R25 "RES - 0402" RES_0402 1195.63,2791.66 r0 top value=4k7
R26 "RES - 0402" RES_0402 1681.69,3186.02 r180 top value=4k7
U1 "MT41J128M16JT-125" MEM_DDR3_MT41J128M16JT-125 1448.66,2707.13 r180 top
U2 "XC6SLX100-3FGG676C" FPGA_XILINX_FGG676 2485.98,2955.91 r0 top

## Footprints (in the part's own frame and the unit in brackets; to place one, negate y for a bottom-side part, rotate by r counter-clockwise, add the part's x,y. Pads: shape width x height; smd on the part's side, far side on the other; paste and mask are expansions set on the pad)
CAP_0402 [mil]
  rrect60% 20x20 smd: 1(-17.5,0) 2(17.5,0)
  silkscreen extent -32,-15 32,15, body extent -19,-10 20,10, height 20
CAP_0603 [mil]
  rrect35% 35x34 smd: 1(-29.5,0) 2(29.5,0)
  silkscreen extent -56,-30 56,30, body extent -32,-16 31,16, height 35
FPGA_XILINX_FGG676 [mm]
  round 0.45 smd mask+0.05: A1(-12.5,12.5) A2(-11.5,12.5) A3(-10.5,12.5) A4(-9.5,12.5) A5(-8.5,12.5) A6(-7.5,12.5) A7(-6.5,12.5) A8(-5.5,12.5) A9(-4.5,12.5) A10(-3.5,12.5) A11(-2.5,12.5) A12(-1.5,12.5) A13(-0.5,12.5) A14(0.5,12.5) A15(1.5,12.5) A16(2.5,12.5) A17(3.5,12.5) A18(4.5,12.5) A19(5.5,12.5) A20(6.5,12.5) A21(7.5,12.5) A22(8.5,12.5) A23(9.5,12.5) A24(10.5,12.5) A25(11.5,12.5) A26(12.5,12.5) AA1(-12.5,-7.5) AA2(-11.5,-7.5) AA3(-10.5,-7.5) AA4(-9.5,-7.5) AA5(-8.5,-7.5) AA6(-7.5,-7.5) AA7(-6.5,-7.5) AA8(-5.5,-7.5) AA9(-4.5,-7.5) AA10(-3.5,-7.5) AA11(-2.5,-7.5) AA12(-1.5,-7.5) AA13(-0.5,-7.5) AA14(0.5,-7.5) AA15(1.5,-7.5) AA16(2.5,-7.5) AA17(3.5,-7.5) AA18(4.5,-7.5) AA19(5.5,-7.5) AA20(6.5,-7.5) AA21(7.5,-7.5) AA22(8.5,-7.5) AA23(9.5,-7.5) AA24(10.5,-7.5) AA25(11.5,-7.5) AA26(12.5,-7.5) AB1(-12.5,-8.5) AB2(-11.5,-8.5) AB3(-10.5,-8.5) AB4(-9.5,-8.5) AB5(-8.5,-8.5) AB6(-7.5,-8.5) AB7(-6.5,-8.5) AB8(-5.5,-8.5) AB9(-4.5,-8.5) AB10(-3.5,-8.5) AB11(-2.5,-8.5) AB12(-1.5,-8.5) AB13(-0.5,-8.5) AB14(0.5,-8.5) AB15(1.5,-8.5) AB16(2.5,-8.5) AB17(3.5,-8.5) AB18(4.5,-8.5) AB19(5.5,-8.5) AB20(6.5,-8.5) AB21(7.5,-8.5) AB22(8.5,-8.5) AB23(9.5,-8.5) AB24(10.5,-8.5) AB25(11.5,-8.5) AB26(12.5,-8.5) AC1(-12.5,-9.5) AC2(-11.5,-9.5) AC3(-10.5,-9.5) AC4(-9.5,-9.5) AC5(-8.5,-9.5) AC6(-7.5,-9.5) AC7(-6.5,-9.5) AC8(-5.5,-9.5) AC9(-4.5,-9.5) AC10(-3.5,-9.5) AC11(-2.5,-9.5) AC12(-1.5,-9.5) AC13(-0.5,-9.5) AC14(0.5,-9.5) AC15(1.5,-9.5) AC16(2.5,-9.5) AC17(3.5,-9.5) AC18(4.5,-9.5) AC19(5.5,-9.5) AC20(6.5,-9.5) AC21(7.5,-9.5) AC22(8.5,-9.5) AC23(9.5,-9.5) AC24(10.5,-9.5) AC25(11.5,-9.5) AC26(12.5,-9.5) AD1(-12.5,-10.5) AD2(-11.5,-10.5) AD3(-10.5,-10.5) AD4(-9.5,-10.5) AD5(-8.5,-10.5) AD6(-7.5,-10.5) AD7(-6.5,-10.5) AD8(-5.5,-10.5) AD9(-4.5,-10.5) AD10(-3.5,-10.5) AD11(-2.5,-10.5) AD12(-1.5,-10.5) AD13(-0.5,-10.5) AD14(0.5,-10.5) AD15(1.5,-10.5) AD16(2.5,-10.5) AD17(3.5,-10.5) AD18(4.5,-10.5) AD19(5.5,-10.5) AD20(6.5,-10.5) AD21(7.5,-10.5) AD22(8.5,-10.5) AD23(9.5,-10.5) AD24(10.5,-10.5) AD25(11.5,-10.5) AD26(12.5,-10.5) AE1(-12.5,-11.5) AE2(-11.5,-11.5) AE3(-10.5,-11.5) AE4(-9.5,-11.5) AE5(-8.5,-11.5) AE6(-7.5,-11.5) AE7(-6.5,-11.5) AE8(-5.5,-11.5) AE9(-4.5,-11.5) AE10(-3.5,-11.5) AE11(-2.5,-11.5) AE12(-1.5,-11.5) AE13(-0.5,-11.5) AE14(0.5,-11.5) AE15(1.5,-11.5) AE16(2.5,-11.5) AE17(3.5,-11.5) AE18(4.5,-11.5) AE19(5.5,-11.5) AE20(6.5,-11.5) AE21(7.5,-11.5) AE22(8.5,-11.5) AE23(9.5,-11.5) AE24(10.5,-11.5) AE25(11.5,-11.5) AE26(12.5,-11.5) AF1(-12.5,-12.5) AF2(-11.5,-12.5) AF3(-10.5,-12.5) AF4(-9.5,-12.5) AF5(-8.5,-12.5) AF6(-7.5,-12.5) AF7(-6.5,-12.5) AF8(-5.5,-12.5) AF9(-4.5,-12.5) AF10(-3.5,-12.5) AF11(-2.5,-12.5) AF12(-1.5,-12.5) AF13(-0.5,-12.5) AF14(0.5,-12.5) AF15(1.5,-12.5) AF16(2.5,-12.5) AF17(3.5,-12.5) AF18(4.5,-12.5) AF19(5.5,-12.5) AF20(6.5,-12.5) AF21(7.5,-12.5) AF22(8.5,-12.5) AF23(9.5,-12.5) AF24(10.5,-12.5) AF25(11.5,-12.5) AF26(12.5,-12.5) B1(-12.5,11.5) B2(-11.5,11.5) B3(-10.5,11.5) B4(-9.5,11.5) B5(-8.5,11.5) B6(-7.5,11.5) B7(-6.5,11.5) B8(-5.5,11.5) B9(-4.5,11.5) B10(-3.5,11.5) B11(-2.5,11.5) B12(-1.5,11.5) B13(-0.5,11.5) B14(0.5,11.5) B15(1.5,11.5) B16(2.5,11.5) B17(3.5,11.5) B18(4.5,11.5) B19(5.5,11.5) B20(6.5,11.5) B21(7.5,11.5) B22(8.5,11.5) B23(9.5,11.5) B24(10.5,11.5) B25(11.5,11.5) B26(12.5,11.5) C1(-12.5,10.5) C2(-11.5,10.5) C3(-10.5,10.5) C4(-9.5,10.5) C5(-8.5,10.5) C6(-7.5,10.5) C7(-6.5,10.5) C8(-5.5,10.5) C9(-4.5,10.5) C10(-3.5,10.5) C11(-2.5,10.5) C12(-1.5,10.5) C13(-0.5,10.5) C14(0.5,10.5) C15(1.5,10.5) C16(2.5,10.5) C17(3.5,10.5) C18(4.5,10.5) C19(5.5,10.5) C20(6.5,10.5) C21(7.5,10.5) C22(8.5,10.5) C23(9.5,10.5) C24(10.5,10.5) C25(11.5,10.5) C26(12.5,10.5) D1(-12.5,9.5) D2(-11.5,9.5) D3(-10.5,9.5) D4(-9.5,9.5) D5(-8.5,9.5) D6(-7.5,9.5) D7(-6.5,9.5) D8(-5.5,9.5) D9(-4.5,9.5) D10(-3.5,9.5) D11(-2.5,9.5) D12(-1.5,9.5) D13(-0.5,9.5) D14(0.5,9.5) D15(1.5,9.5) D16(2.5,9.5) D17(3.5,9.5) D18(4.5,9.5) D19(5.5,9.5) D20(6.5,9.5) D21(7.5,9.5) D22(8.5,9.5) D23(9.5,9.5) D24(10.5,9.5) D25(11.5,9.5) D26(12.5,9.5) E1(-12.5,8.5) E2(-11.5,8.5) E3(-10.5,8.5) E4(-9.5,8.5) E5(-8.5,8.5) E6(-7.5,8.5) E7(-6.5,8.5) E8(-5.5,8.5) E9(-4.5,8.5) E10(-3.5,8.5) E11(-2.5,8.5) E12(-1.5,8.5) E13(-0.5,8.5) E14(0.5,8.5) E15(1.5,8.5) E16(2.5,8.5) E17(3.5,8.5) E18(4.5,8.5) E19(5.5,8.5) E20(6.5,8.5) E21(7.5,8.5) E22(8.5,8.5) E23(9.5,8.5) E24(10.5,8.5) E25(11.5,8.5) E26(12.5,8.5) F1(-12.5,7.5) F2(-11.5,7.5) F3(-10.5,7.5) F4(-9.5,7.5) F5(-8.5,7.5) F6(-7.5,7.5) F7(-6.5,7.5) F8(-5.5,7.5) F9(-4.5,7.5) F10(-3.5,7.5) F11(-2.5,7.5) F12(-1.5,7.5) F13(-0.5,7.5) F14(0.5,7.5) F15(1.5,7.5) F16(2.5,7.5) F17(3.5,7.5) F18(4.5,7.5) F19(5.5,7.5) F20(6.5,7.5) F21(7.5,7.5) F22(8.5,7.5) F23(9.5,7.5) F24(10.5,7.5) F25(11.5,7.5) F26(12.5,7.5) G1(-12.5,6.5) G2(-11.5,6.5) G3(-10.5,6.5) G4(-9.5,6.5) G5(-8.5,6.5) G6(-7.5,6.5) G7(-6.5,6.5) G8(-5.5,6.5) G9(-4.5,6.5) G10(-3.5,6.5) G11(-2.5,6.5) G12(-1.5,6.5) G13(-0.5,6.5) G14(0.5,6.5) G15(1.5,6.5) G16(2.5,6.5) G17(3.5,6.5) G18(4.5,6.5) G19(5.5,6.5) G20(6.5,6.5) G21(7.5,6.5) G22(8.5,6.5) G23(9.5,6.5) G24(10.5,6.5) G25(11.5,6.5) G26(12.5,6.5) H1(-12.5,5.5) H2(-11.5,5.5) H3(-10.5,5.5) H4(-9.5,5.5) H5(-8.5,5.5) H6(-7.5,5.5) H7(-6.5,5.5) H8(-5.5,5.5) H9(-4.5,5.5) H10(-3.5,5.5) H11(-2.5,5.5) H12(-1.5,5.5) H13(-0.5,5.5) H14(0.5,5.5) H15(1.5,5.5) H16(2.5,5.5) H17(3.5,5.5) H18(4.5,5.5) H19(5.5,5.5) H20(6.5,5.5) H21(7.5,5.5) H22(8.5,5.5) H23(9.5,5.5) H24(10.5,5.5) H25(11.5,5.5) H26(12.5,5.5) J1(-12.5,4.5) J2(-11.5,4.5) J3(-10.5,4.5) J4(-9.5,4.5) J5(-8.5,4.5) J6(-7.5,4.5) J7(-6.5,4.5) J8(-5.5,4.5) J9(-4.5,4.5) J10(-3.5,4.5) J11(-2.5,4.5) J12(-1.5,4.5) J13(-0.5,4.5) J14(0.5,4.5) J15(1.5,4.5) J16(2.5,4.5) J17(3.5,4.5) J18(4.5,4.5) J19(5.5,4.5) J20(6.5,4.5) J21(7.5,4.5) J22(8.5,4.5) J23(9.5,4.5) J24(10.5,4.5) J25(11.5,4.5) J26(12.5,4.5) K1(-12.5,3.5) K2(-11.5,3.5) K3(-10.5,3.5) K4(-9.5,3.5) K5(-8.5,3.5) K6(-7.5,3.5) K7(-6.5,3.5) K8(-5.5,3.5) K9(-4.5,3.5) K10(-3.5,3.5) K11(-2.5,3.5) K12(-1.5,3.5) K13(-0.5,3.5) K14(0.5,3.5) K15(1.5,3.5) K16(2.5,3.5) K17(3.5,3.5) K18(4.5,3.5) K19(5.5,3.5) K20(6.5,3.5) K21(7.5,3.5) K22(8.5,3.5) K23(9.5,3.5) K24(10.5,3.5) K25(11.5,3.5) K26(12.5,3.5) L1(-12.5,2.5) L2(-11.5,2.5) L3(-10.5,2.5) L4(-9.5,2.5) L5(-8.5,2.5) L6(-7.5,2.5) L7(-6.5,2.5) L8(-5.5,2.5) L9(-4.5,2.5) L10(-3.5,2.5) L11(-2.5,2.5) L12(-1.5,2.5) L13(-0.5,2.5) L14(0.5,2.5) L15(1.5,2.5) L16(2.5,2.5) L17(3.5,2.5) L18(4.5,2.5) L19(5.5,2.5) L20(6.5,2.5) L21(7.5,2.5) L22(8.5,2.5) L23(9.5,2.5) L24(10.5,2.5) L25(11.5,2.5) L26(12.5,2.5) M1(-12.5,1.5) M2(-11.5,1.5) M3(-10.5,1.5) M4(-9.5,1.5) M5(-8.5,1.5) M6(-7.5,1.5) M7(-6.5,1.5) M8(-5.5,1.5) M9(-4.5,1.5) M10(-3.5,1.5) M11(-2.5,1.5) M12(-1.5,1.5) M13(-0.5,1.5) M14(0.5,1.5) M15(1.5,1.5) M16(2.5,1.5) M17(3.5,1.5) M18(4.5,1.5) M19(5.5,1.5) M20(6.5,1.5) M21(7.5,1.5) M22(8.5,1.5) M23(9.5,1.5) M24(10.5,1.5) M25(11.5,1.5) M26(12.5,1.5) N1(-12.5,0.5) N2(-11.5,0.5) N3(-10.5,0.5) N4(-9.5,0.5) N5(-8.5,0.5) N6(-7.5,0.5) N7(-6.5,0.5) N8(-5.5,0.5) N9(-4.5,0.5) N10(-3.5,0.5) N11(-2.5,0.5) N12(-1.5,0.5) N13(-0.5,0.5) N14(0.5,0.5) N15(1.5,0.5) N16(2.5,0.5) N17(3.5,0.5) N18(4.5,0.5) N19(5.5,0.5) N20(6.5,0.5) N21(7.5,0.5) N22(8.5,0.5) N23(9.5,0.5) N24(10.5,0.5) N25(11.5,0.5) N26(12.5,0.5) P1(-12.5,-0.5) P2(-11.5,-0.5) P3(-10.5,-0.5) P4(-9.5,-0.5) P5(-8.5,-0.5) P6(-7.5,-0.5) P7(-6.5,-0.5) P8(-5.5,-0.5) P9(-4.5,-0.5) P10(-3.5,-0.5) P11(-2.5,-0.5) P12(-1.5,-0.5) P13(-0.5,-0.5) P14(0.5,-0.5) P15(1.5,-0.5) P16(2.5,-0.5) P17(3.5,-0.5) P18(4.5,-0.5) P19(5.5,-0.5) P20(6.5,-0.5) P21(7.5,-0.5) P22(8.5,-0.5) P23(9.5,-0.5) P24(10.5,-0.5) P25(11.5,-0.5) P26(12.5,-0.5) R1(-12.5,-1.5) R2(-11.5,-1.5) R3(-10.5,-1.5) R4(-9.5,-1.5) R5(-8.5,-1.5) R6(-7.5,-1.5) R7(-6.5,-1.5) R8(-5.5,-1.5) R9(-4.5,-1.5) R10(-3.5,-1.5) R11(-2.5,-1.5) R12(-1.5,-1.5) R13(-0.5,-1.5) R14(0.5,-1.5) R15(1.5,-1.5) R16(2.5,-1.5) R17(3.5,-1.5) R18(4.5,-1.5) R19(5.5,-1.5) R20(6.5,-1.5) R21(7.5,-1.5) R22(8.5,-1.5) R23(9.5,-1.5) R24(10.5,-1.5) R25(11.5,-1.5) R26(12.5,-1.5) T1(-12.5,-2.5) T2(-11.5,-2.5) T3(-10.5,-2.5) T4(-9.5,-2.5) T5(-8.5,-2.5) T6(-7.5,-2.5) T7(-6.5,-2.5) T8(-5.5,-2.5) T9(-4.5,-2.5) T10(-3.5,-2.5) T11(-2.5,-2.5) T12(-1.5,-2.5) T13(-0.5,-2.5) T14(0.5,-2.5) T15(1.5,-2.5) T16(2.5,-2.5) T17(3.5,-2.5) T18(4.5,-2.5) T19(5.5,-2.5) T20(6.5,-2.5) T21(7.5,-2.5) T22(8.5,-2.5) T23(9.5,-2.5) T24(10.5,-2.5) T25(11.5,-2.5) T26(12.5,-2.5) U1(-12.5,-3.5) U2(-11.5,-3.5) U3(-10.5,-3.5) U4(-9.5,-3.5) U5(-8.5,-3.5) U6(-7.5,-3.5) U7(-6.5,-3.5) U8(-5.5,-3.5) U9(-4.5,-3.5) U10(-3.5,-3.5) U11(-2.5,-3.5) U12(-1.5,-3.5) U13(-0.5,-3.5) U14(0.5,-3.5) U15(1.5,-3.5) U16(2.5,-3.5) U17(3.5,-3.5) U18(4.5,-3.5) U19(5.5,-3.5) U20(6.5,-3.5) U21(7.5,-3.5) U22(8.5,-3.5) U23(9.5,-3.5) U24(10.5,-3.5) U25(11.5,-3.5) U26(12.5,-3.5) V1(-12.5,-4.5) V2(-11.5,-4.5) V3(-10.5,-4.5) V4(-9.5,-4.5) V5(-8.5,-4.5) V6(-7.5,-4.5) V7(-6.5,-4.5) V8(-5.5,-4.5) V9(-4.5,-4.5) V10(-3.5,-4.5) V11(-2.5,-4.5) V12(-1.5,-4.5) V13(-0.5,-4.5) V14(0.5,-4.5) V15(1.5,-4.5) V16(2.5,-4.5) V17(3.5,-4.5) V18(4.5,-4.5) V19(5.5,-4.5) V20(6.5,-4.5) V21(7.5,-4.5) V22(8.5,-4.5) V23(9.5,-4.5) V24(10.5,-4.5) V25(11.5,-4.5) V26(12.5,-4.5) W1(-12.5,-5.5) W2(-11.5,-5.5) W3(-10.5,-5.5) W4(-9.5,-5.5) W5(-8.5,-5.5) W6(-7.5,-5.5) W7(-6.5,-5.5) W8(-5.5,-5.5) W9(-4.5,-5.5) W10(-3.5,-5.5) W11(-2.5,-5.5) W12(-1.5,-5.5) W13(-0.5,-5.5) W14(0.5,-5.5) W15(1.5,-5.5) W16(2.5,-5.5) W17(3.5,-5.5) W18(4.5,-5.5) W19(5.5,-5.5) W20(6.5,-5.5) W21(7.5,-5.5) W22(8.5,-5.5) W23(9.5,-5.5) W24(10.5,-5.5) W25(11.5,-5.5) W26(12.5,-5.5) Y1(-12.5,-6.5) Y2(-11.5,-6.5) Y3(-10.5,-6.5) Y4(-9.5,-6.5) Y5(-8.5,-6.5) Y6(-7.5,-6.5) Y7(-6.5,-6.5) Y8(-5.5,-6.5) Y9(-4.5,-6.5) Y10(-3.5,-6.5) Y11(-2.5,-6.5) Y12(-1.5,-6.5) Y13(-0.5,-6.5) Y14(0.5,-6.5) Y15(1.5,-6.5) Y16(2.5,-6.5) Y17(3.5,-6.5) Y18(4.5,-6.5) Y19(5.5,-6.5) Y20(6.5,-6.5) Y21(7.5,-6.5) Y22(8.5,-6.5) Y23(9.5,-6.5) Y24(10.5,-6.5) Y25(11.5,-6.5) Y26(12.5,-6.5)
  silkscreen extent -13.75,-13.5 13.5,13.75, body extent -13.5,-13.53 13.5,13.47, height 2.24
MEM_DDR3_MT41J128M16JT-125 [mm]
  round 0.45 smd: A1(-3.2,6) A2(-2.4,6) A3(-1.6,6) A7(1.6,6) A8(2.4,6) A9(3.2,6) B1(-3.2,5.2) B2(-2.4,5.2) B3(-1.6,5.2) B7(1.6,5.2) B8(2.4,5.2) B9(3.2,5.2) C1(-3.2,4.4) C2(-2.4,4.4) C3(-1.6,4.4) C7(1.6,4.4) C8(2.4,4.4) C9(3.2,4.4) D1(-3.2,3.6) D2(-2.4,3.6) D3(-1.6,3.6) D7(1.6,3.6) D8(2.4,3.6) D9(3.2,3.6) E1(-3.2,2.8) E2(-2.4,2.8) E3(-1.6,2.8) E7(1.6,2.8) E8(2.4,2.8) E9(3.2,2.8) F1(-3.2,2) F2(-2.4,2) F3(-1.6,2) F7(1.6,2) F8(2.4,2) F9(3.2,2) G1(-3.2,1.2) G2(-2.4,1.2) G3(-1.6,1.2) G7(1.6,1.2) G8(2.4,1.2) G9(3.2,1.2) H1(-3.2,0.4) H2(-2.4,0.4) H3(-1.6,0.4) H7(1.6,0.4) H8(2.4,0.4) H9(3.2,0.4) J1(-3.2,-0.4) J2(-2.4,-0.4) J3(-1.6,-0.4) J7(1.6,-0.4) J8(2.4,-0.4) J9(3.2,-0.4) K1(-3.2,-1.2) K2(-2.4,-1.2) K3(-1.6,-1.2) K7(1.6,-1.2) K8(2.4,-1.2) K9(3.2,-1.2) L1(-3.2,-2) L2(-2.4,-2) L3(-1.6,-2) L7(1.6,-2) L8(2.4,-2) L9(3.2,-2) M1(-3.2,-2.8) M2(-2.4,-2.8) M3(-1.6,-2.8) M7(1.6,-2.8) M8(2.4,-2.8) M9(3.2,-2.8) N1(-3.2,-3.6) N2(-2.4,-3.6) N3(-1.6,-3.6) N7(1.6,-3.6) N8(2.4,-3.6) N9(3.2,-3.6) P1(-3.2,-4.4) P2(-2.4,-4.4) P3(-1.6,-4.4) P7(1.6,-4.4) P8(2.4,-4.4) P9(3.2,-4.4) R1(-3.2,-5.2) R2(-2.4,-5.2) R3(-1.6,-5.2) R7(1.6,-5.2) R8(2.4,-5.2) R9(3.2,-5.2) T1(-3.2,-6) T2(-2.4,-6) T3(-1.6,-6) T7(1.6,-6) T8(2.4,-6) T9(3.2,-6)
  silkscreen extent -4.98,-6.98 4.5,7.01, body extent -4.5,-7 4.5,7, height 1.05
RES_0402 [mil]
  rrect60% 20x20 smd: 1(-17.5,0) 2(17.5,0)
  silkscreen extent -32,-15 32,15, body extent -23,-11 23,11, height 16

## Part data
C1 C2 C4 C5 C7 C8 C16 C17 C19 C20: Mfg Part Number=GRM022R60J104KE15, Package=0402, Voltage=6.3V, CreatedBy="Jonathan Bouchard", Mfg=Murata, Precision=10%
C3 C6 C15 C18: Package=0603, Voltage=6.3V, CreatedBy="Jonathan Bouchard", Precision=10%
R18 R24 R25 R26: Package=0402, Power=1/16W, Voltage=50V, CreatedBy="Jonathan Bouchard", Precision=1%
U1: library part "MEM_DDR3_MT41J128M16JT-125:K TR", "MEM - DDR3 SDRAM 2GBIT 800MHZ - TFBGA-96", Package=TFBGA-96, Supplier Part Number 1=557-1611-1-ND, Temperature="0°C ~ 95°C (TC)", Voltage="1.425 V ~ 1.575 V", CreatedBy="Jonathan Bouchard", HelpURL=http://ww1.microchip.com/downloads/en/DeviceDoc/00002275A.pdf, Mfg=Micrel, Mfg Part Number=http://www.micron.com/~/media/Documents/Products/Data%20Sheet/DRAM/DDR3/2Gb_DDR3_SDRAM.pdf, Supplier 1=Digikey
U2: library part FPGA_XC6SLX100-3FGG676C, "FPGA - XILINX SPARTAN 6 480 I/O - BGA-676", Package=BGA-676, Supplier Part Number 1=122-1760-ND, Temperature="0°C ~ 85°C (TJ)", Voltage="1.14 V ~ 1.26 V", CreatedBy="Jonathan Bouchard", HelpURL=https://www.xilinx.com/support/documentation/data_sheets/ds162.pdf, Mfg=Xilinx, Mfg Part Number=XC6SLX100-3FGG676C, Supplier 1=Digikey

## Via types
v1: diameter 12, hole 8, Signal 1 (Top) to Signal 4 (Bottom), 46 vias

## Nets (pads, with @x,y where several pads share a name; then routed paths per layer and width w, separated by ;. In a path a pad name is that pad's centre, name@x,y a point inside that pad or via, vN(x,y) a via of type N, cw(c..) or ccw(c..) an arc to the next point about the centre after c; other vN are vias at no path point)
0P75V: 
1P2V: U2.K11 U2.K17 U2.L10 U2.L12 U2.L14 U2.L16 U2.M11 U2.M13 U2.M15 U2.N12 U2.N14 U2.N16 U2.P11 U2.P13 U2.P15 U2.R12 U2.R14 U2.R16 U2.T11 U2.T13 U2.T15 U2.T17 U2.U10 U2.U16
1P5V: C3.2 C4.2 C5.2 C6.2 C7.2 C8.2 C15.2 C16.2 C17.2 C18.2 C19.2 C20.2 U1.A1 U1.A8 U1.B2 U1.C1 U1.C9 U1.D2 U1.D9 U1.E9 U1.F1 U1.G7 U1.H2 U1.H9 U1.K2 U1.K8 U1.N1 U1.N9 U1.R1 U1.R9 U2.AC6 U2.AD2 U2.M7 U2.P4 U2.P9 U2.T2 U2.T7 U2.W4 U2.W6 U2.Y2 | length 187.1
  Signal 1 (Top) w4: U1.N1@1574.65,2848.86 1574.81,2849.03 1647.47,2849.03 C16.2@1647.64,2849.19 ; U1.R1@1574.65,2911.85 1576.23,2910.27 1646.05,2910.27 C17.2@1647.64,2908.68
  Signal 1 (Top) w5: 1510.04,2738.58 1524.08,2738.58 1539.87,2754.37 U1.K2@1543.15,2754.37
2P5V: 
3P3V: U2.AA6 U2.AA10 U2.AA16 U2.AA21 U2.AB14 U2.AB23 U2.AC10 U2.AC18 U2.AC21 U2.AD25 U2.AE8 U2.AE12 U2.AE16 U2.AE20 U2.F6 U2.F21 U2.G12 U2.G15 U2.J9 U2.J18 U2.K13 U2.L5 U2.L22 U2.M17 U2.M20 U2.N10 U2.P23 U2.T25 U2.U6 U2.U14 U2.U18 U2.V9 U2.V21 U2.W23 U2.Y12 U2.Y17 U2.Y19 U2.Y25
3P3V_VITA: 
3P3VAUX: 
5P0V: 
12P0V: 
24P0V: 
125_MHZ_CLK_N: 
125_MHZ_CLK_P: 
#CLK_CFG_CS: U2.AE19
#FPGA_RESET: U2.AF3
#LED1: U2.Y15
#LED2: U2.AA15
#LED3: U2.Y14
#LED4: U2.AA14
#MOTOR_ENABLE: U2.R21
#MOTOR_RESET: U2.R22
#MOTOR_SLEEP: U2.P17
#MOTOR_SR: U2.T22
#PHY_RST: U2.M18
#USER_BTN1: U2.AB15
#USER_BTN2: U2.AC14
CK_N: R18.2 U1.K7 U2.R3 | length 42.1
  Signal 1 (Top) w4: U1.K7@1385.67,2754.37 1398.77,2741.27 1422.37,2741.27
CK_P: R18.1 U1.J7 U2.R4 | length 44.3
  Signal 1 (Top) w4: U1.J7@1385.67,2722.87 1385.89,2722.87 1396.29,2733.27 1425.68,2733.27
CLK0_M2C_n: U2.M21
CLK0_M2C_p: U2.N20
CLK1_M2C_n: U2.P22
CLK1_M2C_p: U2.P21
CLK2_BIDIR_n: U2.AF13
CLK2_BIDIR_p: U2.AE13
CLK3_BIDIR_n: U2.AF14
CLK3_BIDIR_p: U2.AD14
CLK_100MHZ_N: U2.W24
CLK_100MHZ_P: U2.V23
CLK_CFG_MISO: U2.AF20
CLK_DIR: U2.AF19
CLK_SYNC: U2.AC16
DDR3.CASN: U1.K3 U2.P8 | length 191.1
  Signal 1 (Top) w5: U1.K3@1511.65,2754.37 1521.43,2754.37 1536.79,2769.73 1626.43,2769.73 1638.68,2781.98 1691.34,2781.98
DDR3.CKE: R25.2 U1.K9 U2.M9 | length 220.7
  Signal 1 (Top) w5: R25.2@1213.13,2791.66 1213.13,2770.14 1228.9,2754.37 U1.K9@1322.68,2754.37 1332.45,2754.37 1347.81,2769.73 1399.37,2769.73
DDR3.LDM: U1.E7 U2.W3